# Altium PCB PCB_DMEM_Mezzanine.PcbDoc (part 1 of 4)
Units mil, origin at the board's own origin, x right, y up, seen from the top; angles counter-clockwise.
Board outline 2250 x 3200 mil, 6 copper layers (Top Layer - Signal, AGND-L1, Int. Signal, Power-GND, AGND-D.Sig., Bottom Layer - Signal), stack 32.112 mil thick; 443 components, 241 nets, 1099 pads, 545 vias.
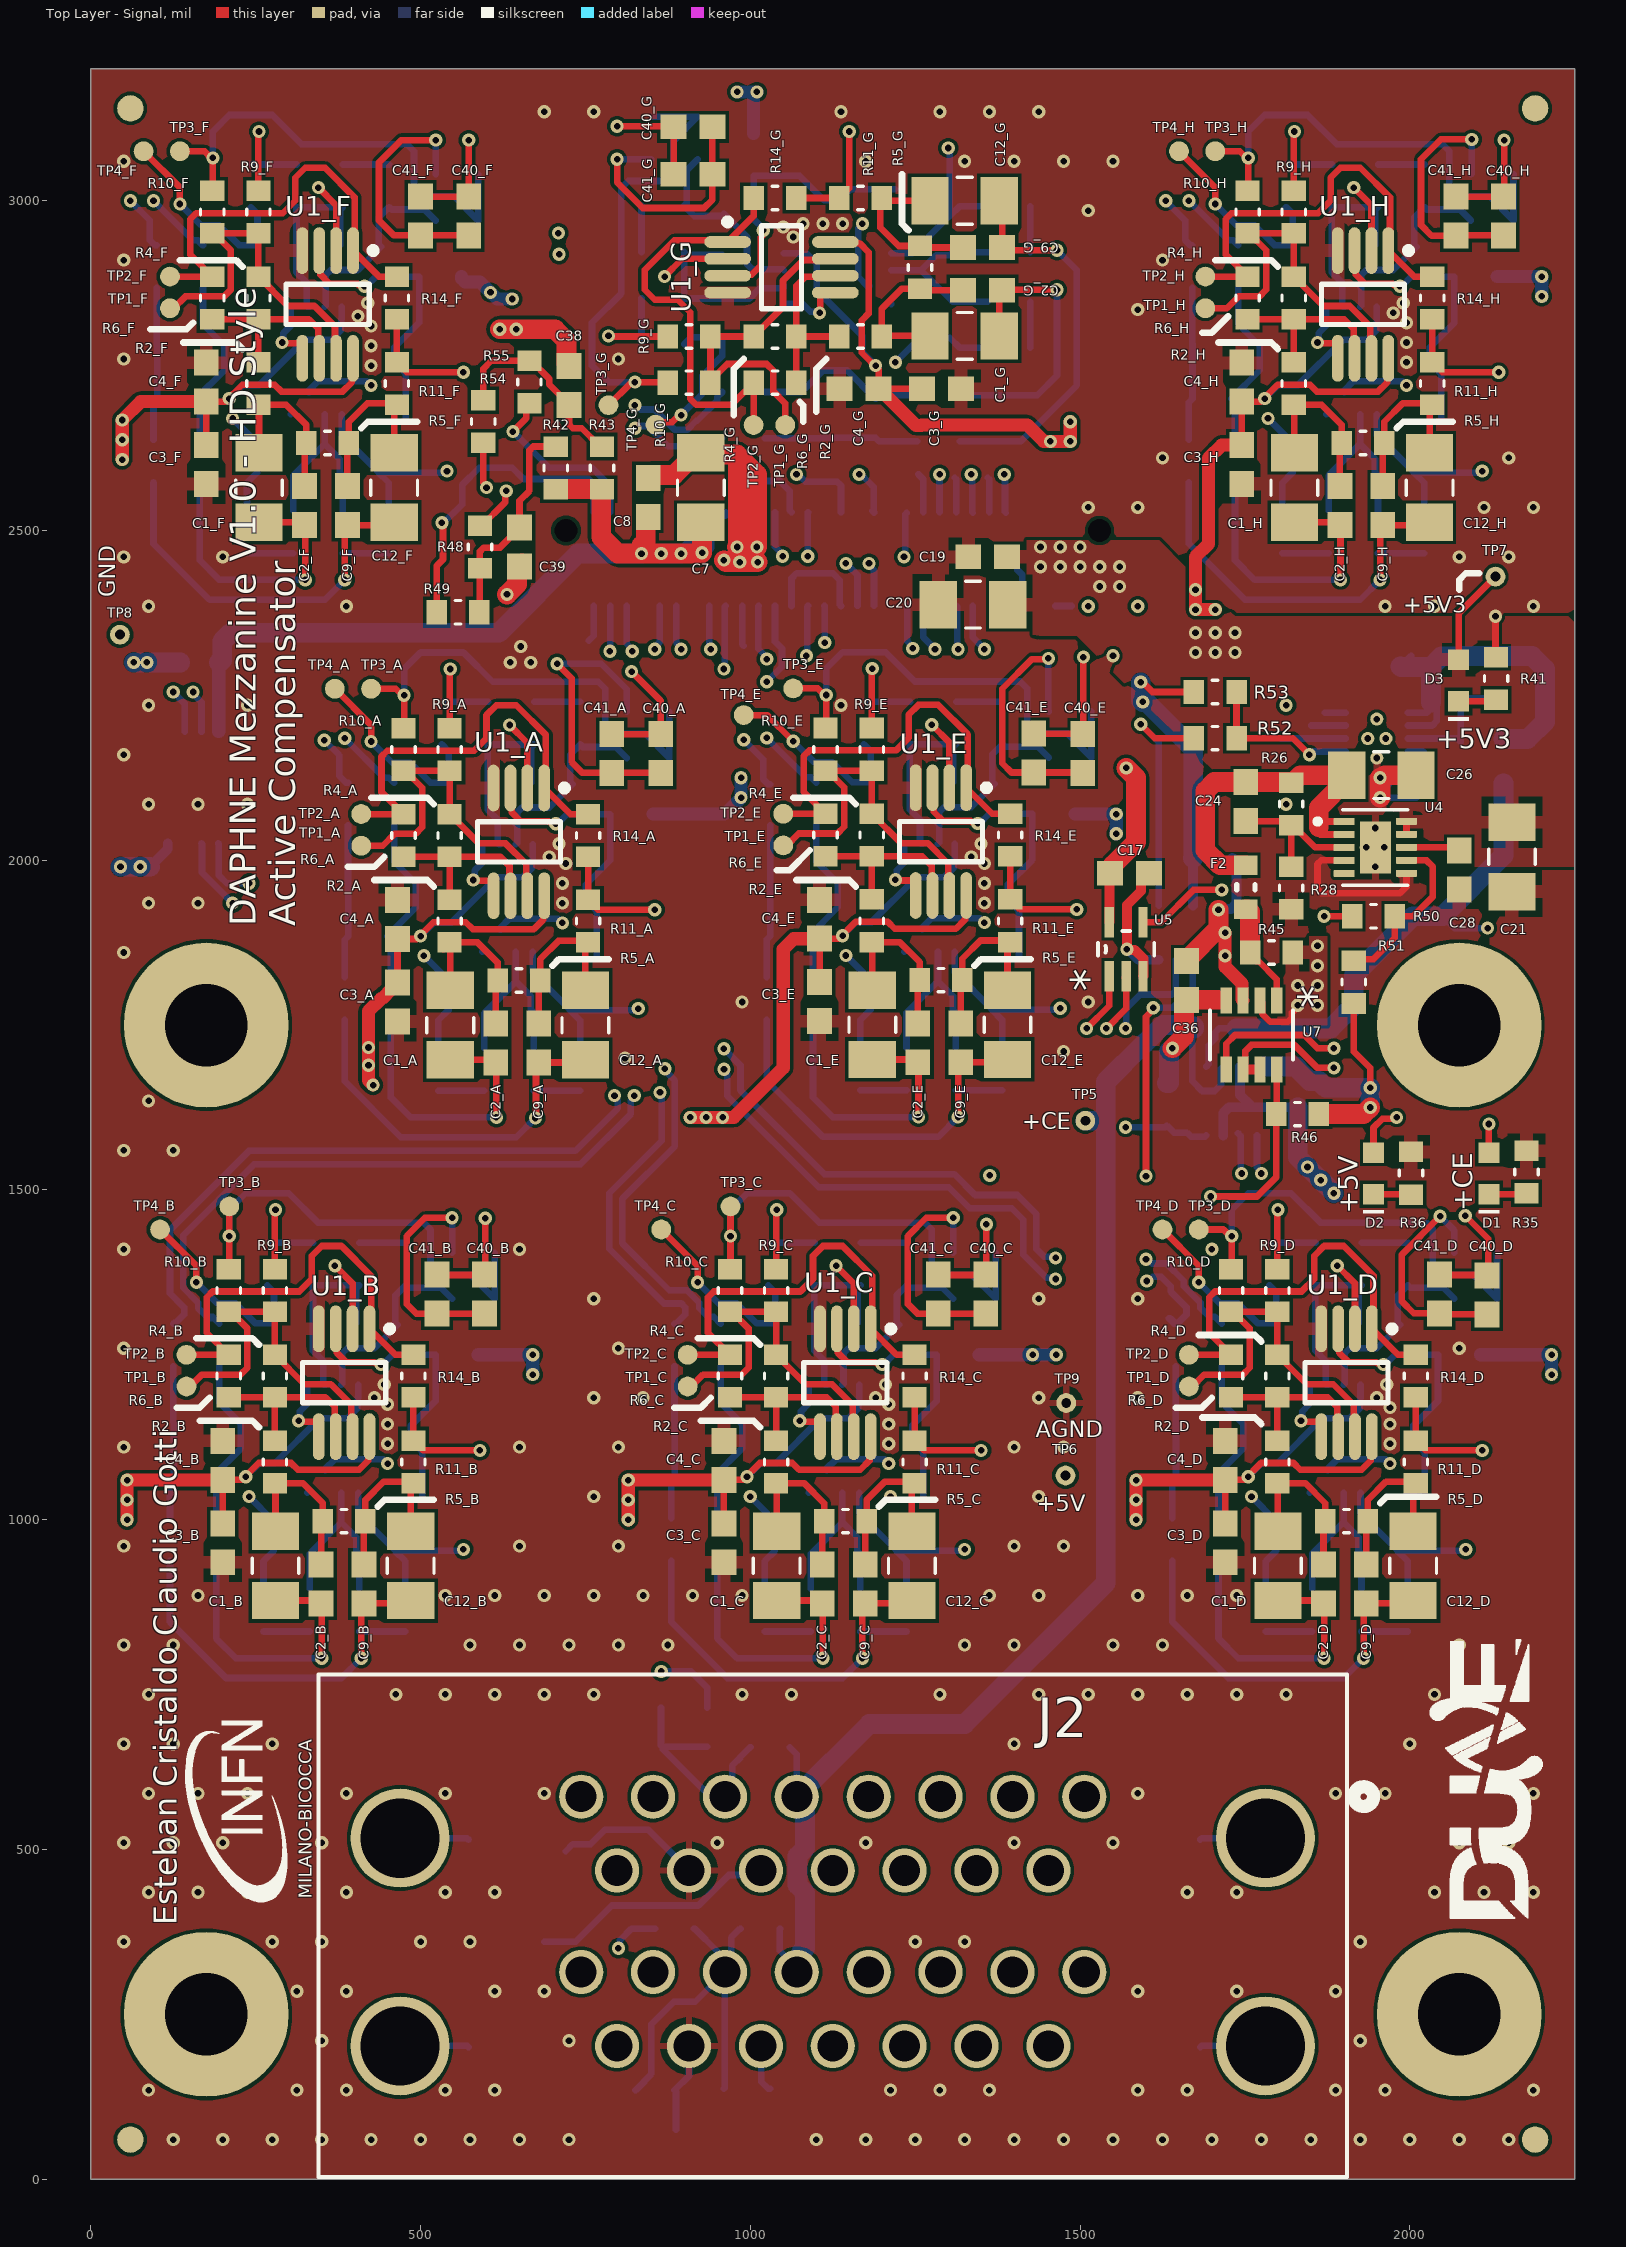
[diagram p0: Top Layer - Signal view]
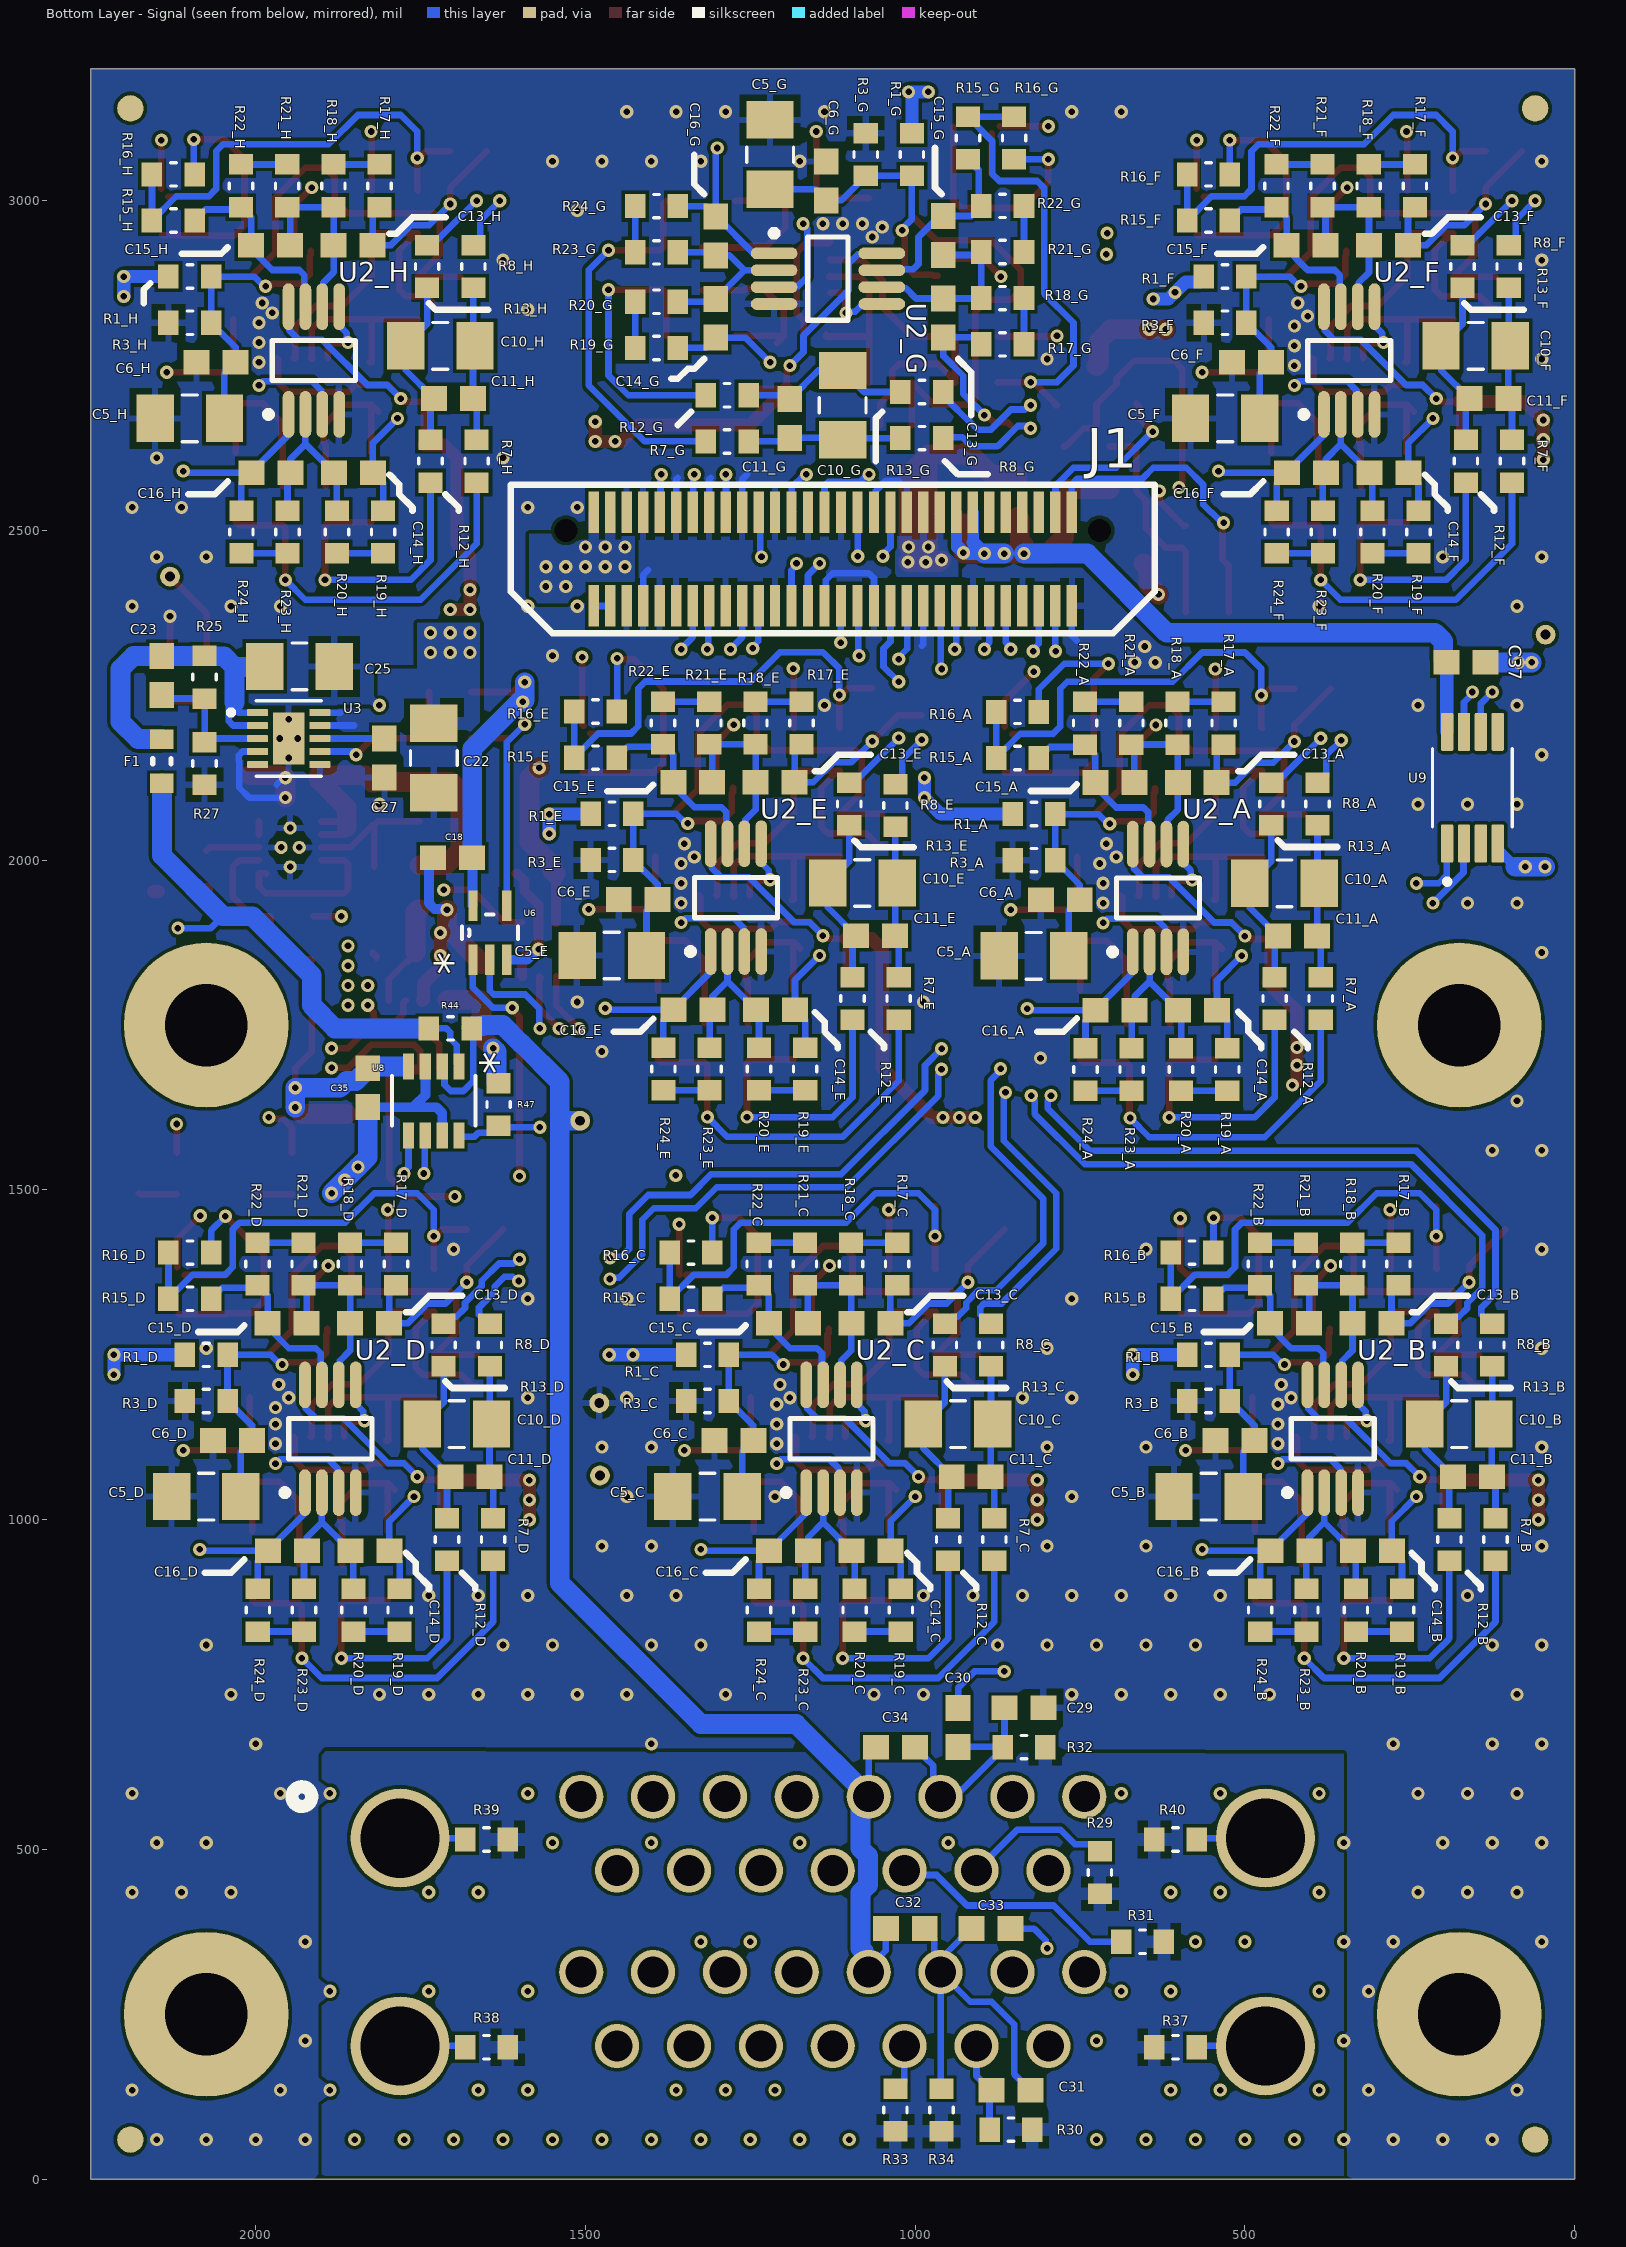
[diagram p1: Bottom Layer - Signal view, seen from below]
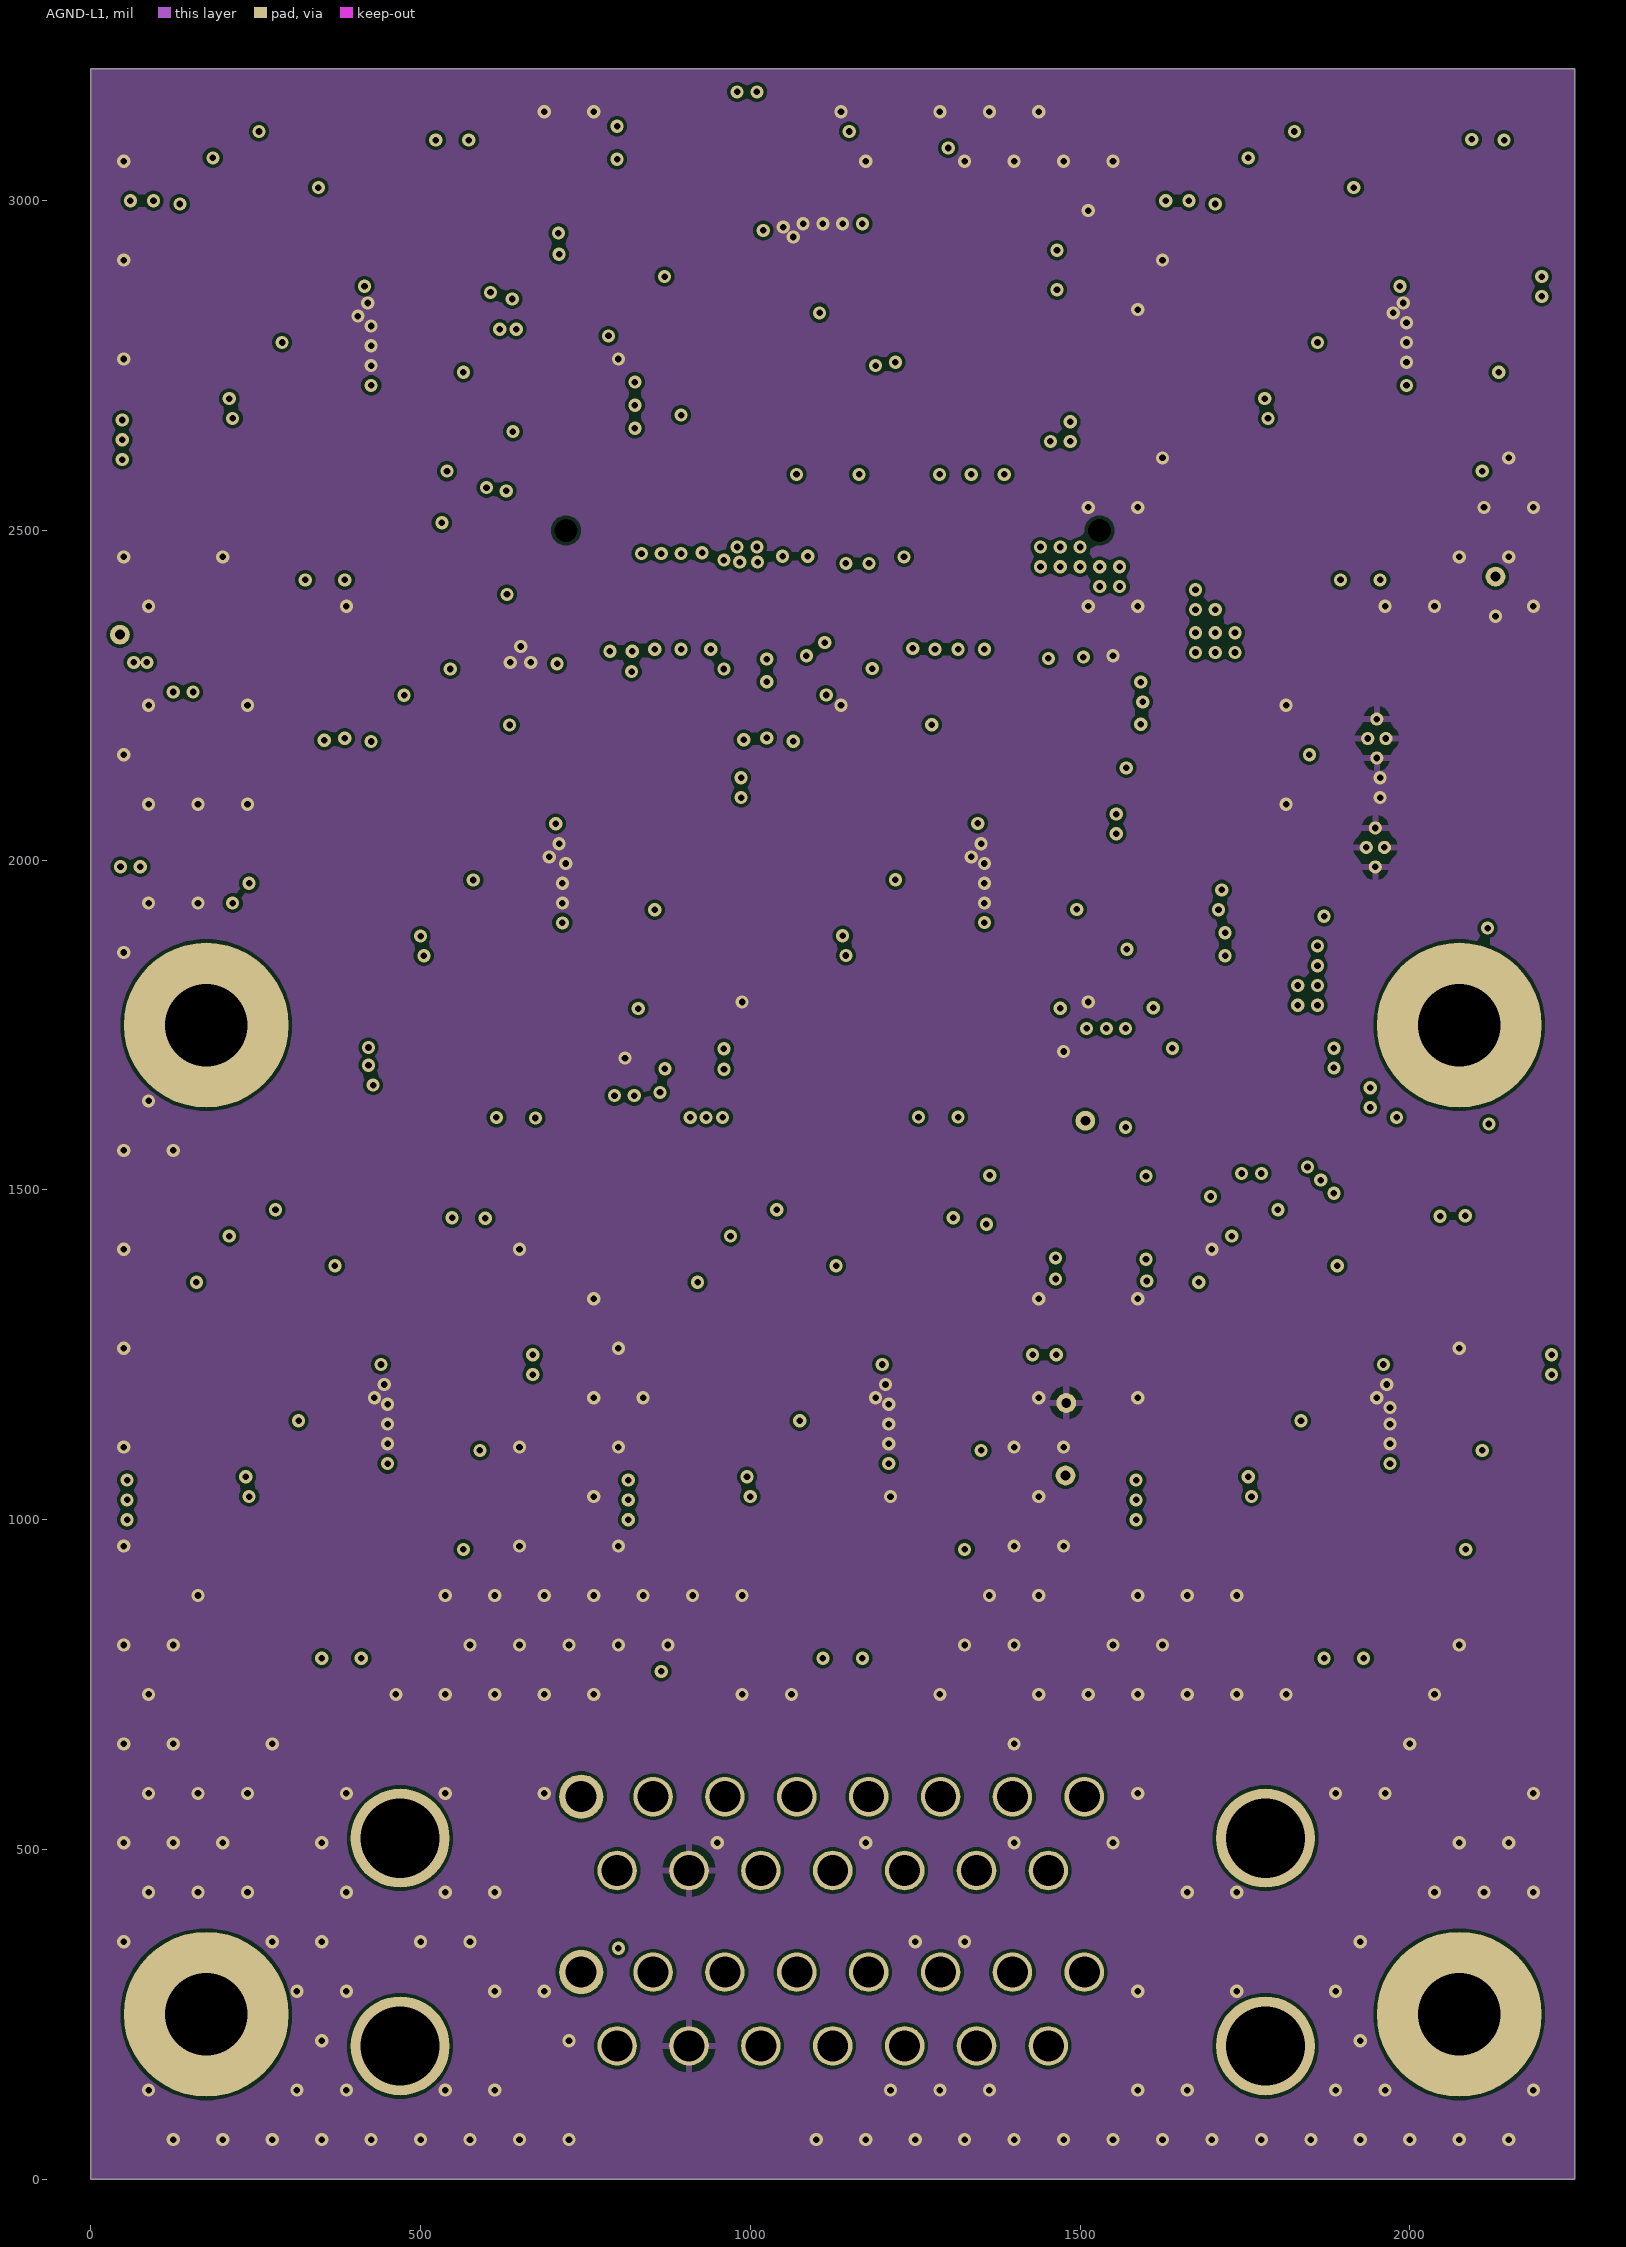
[diagram p2: AGND-L1]
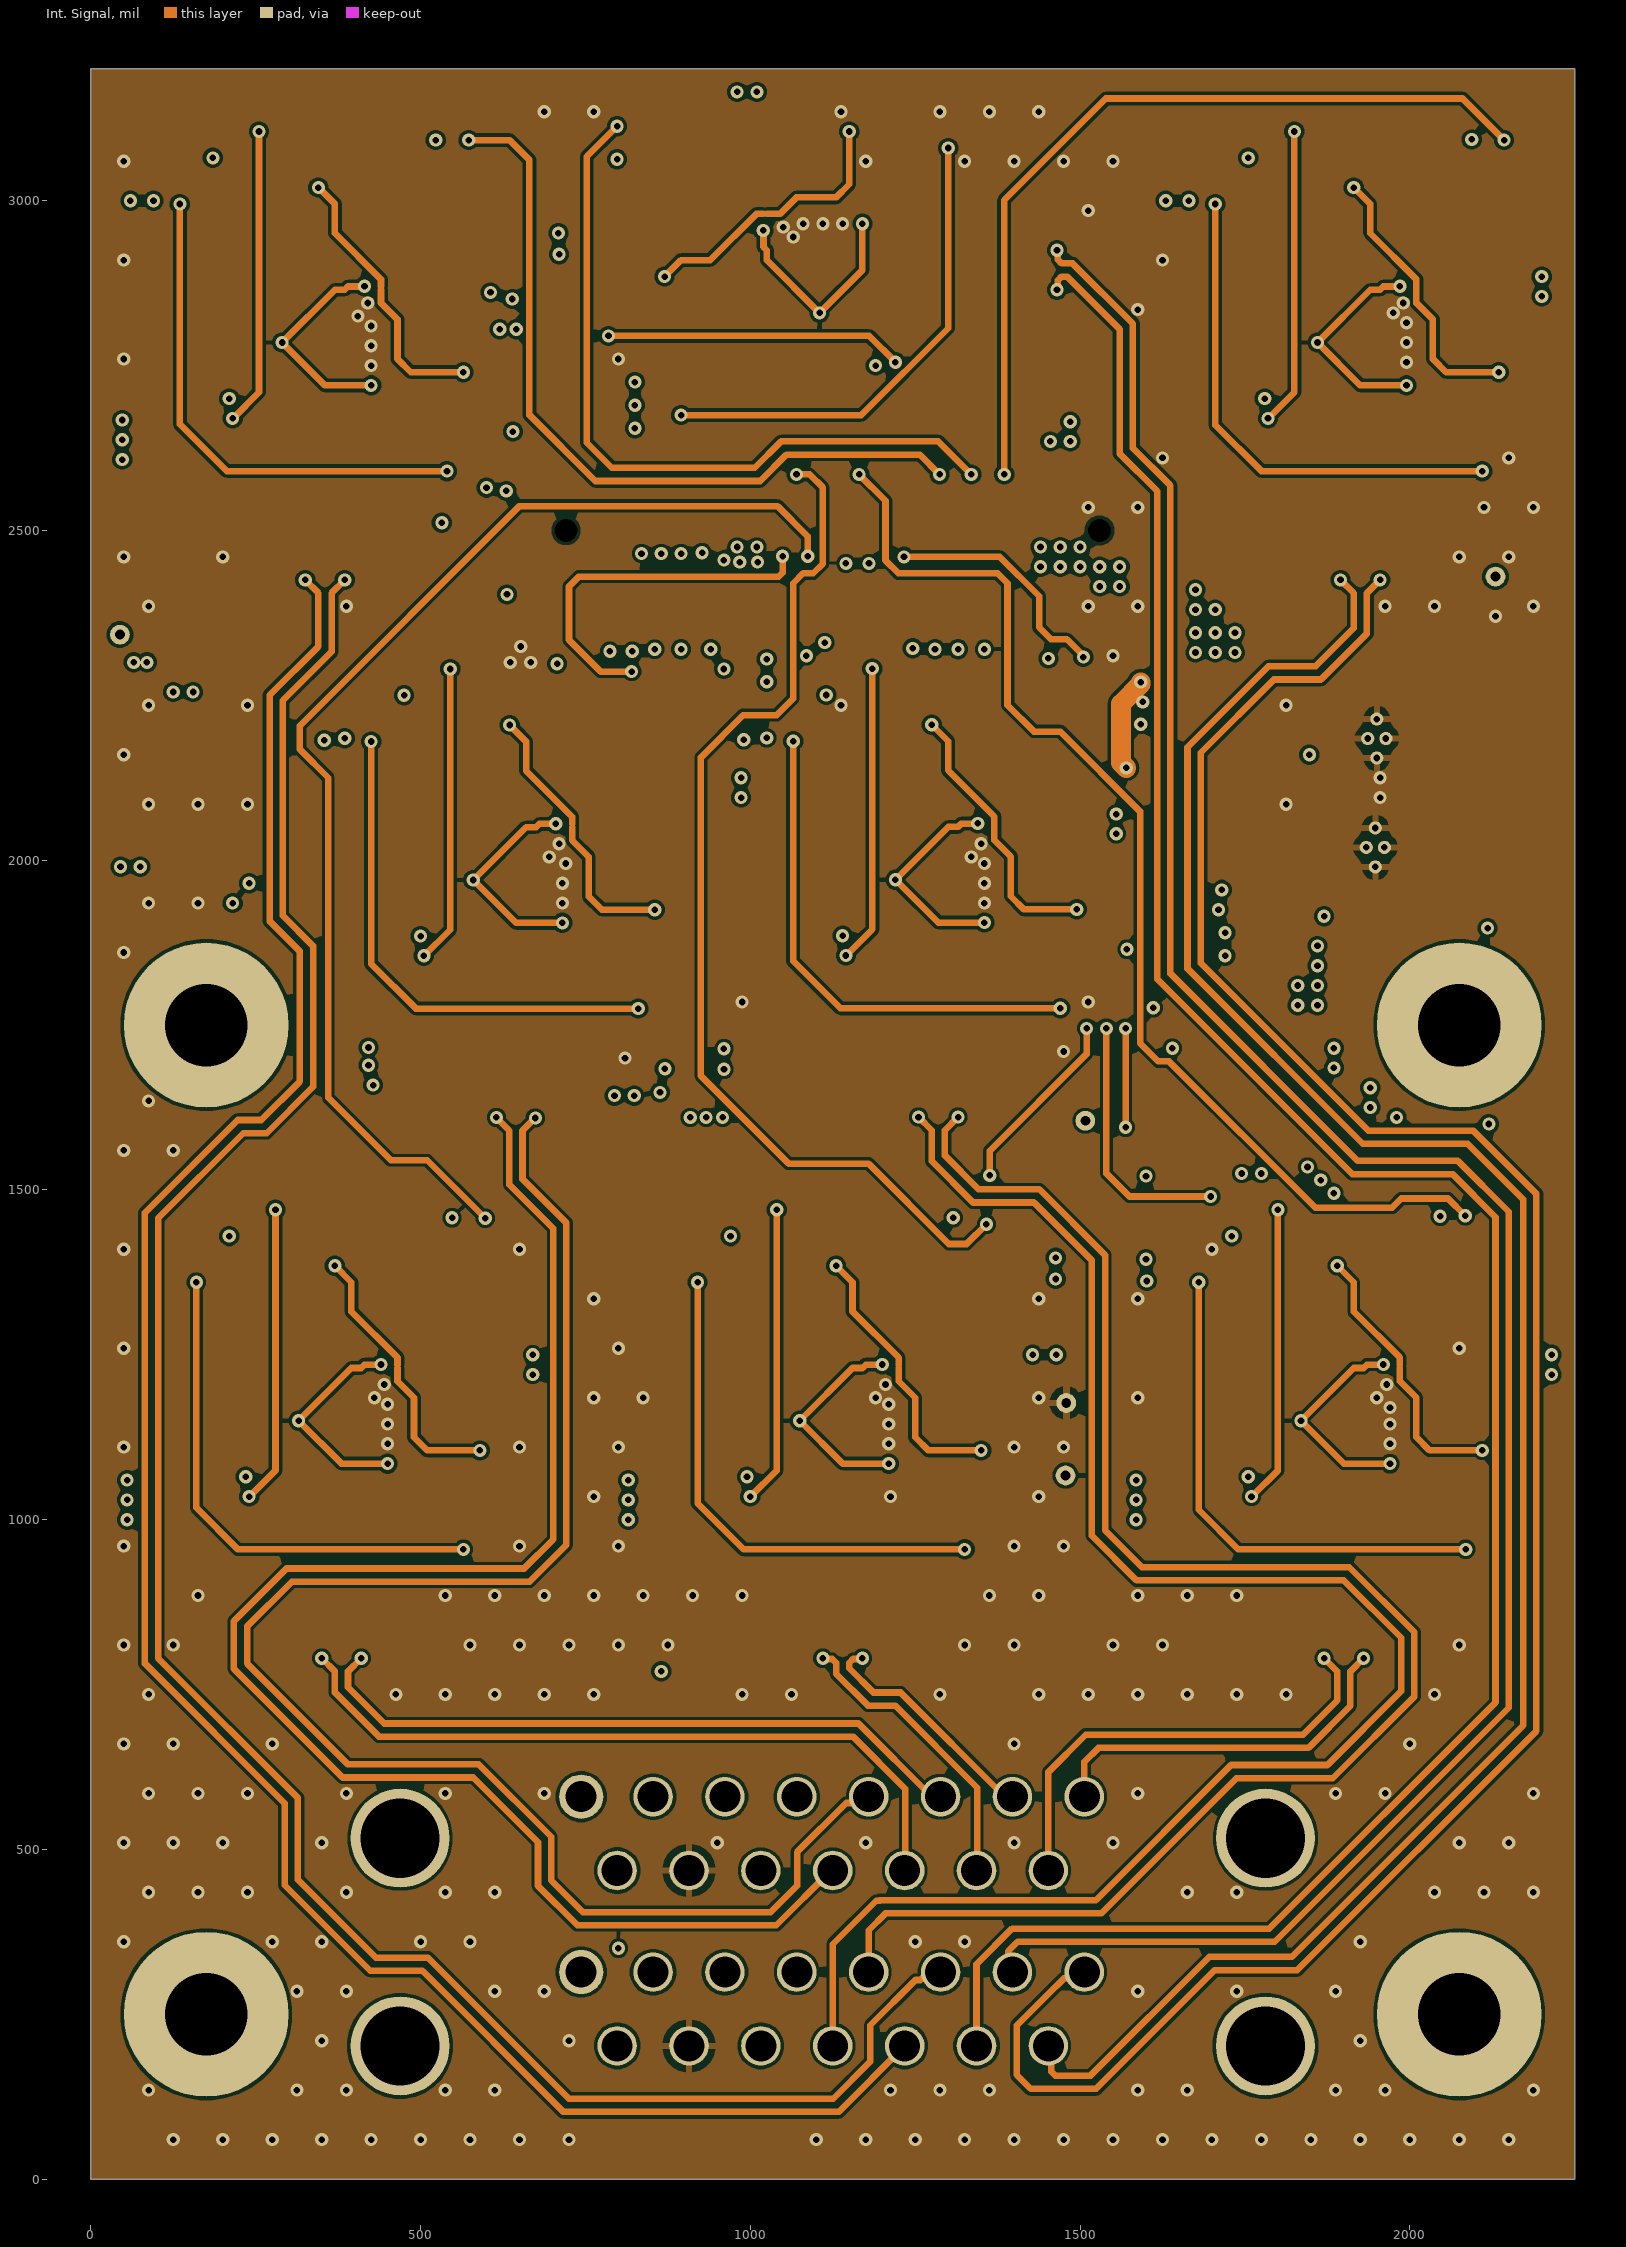
[diagram p3: Int. Signal]
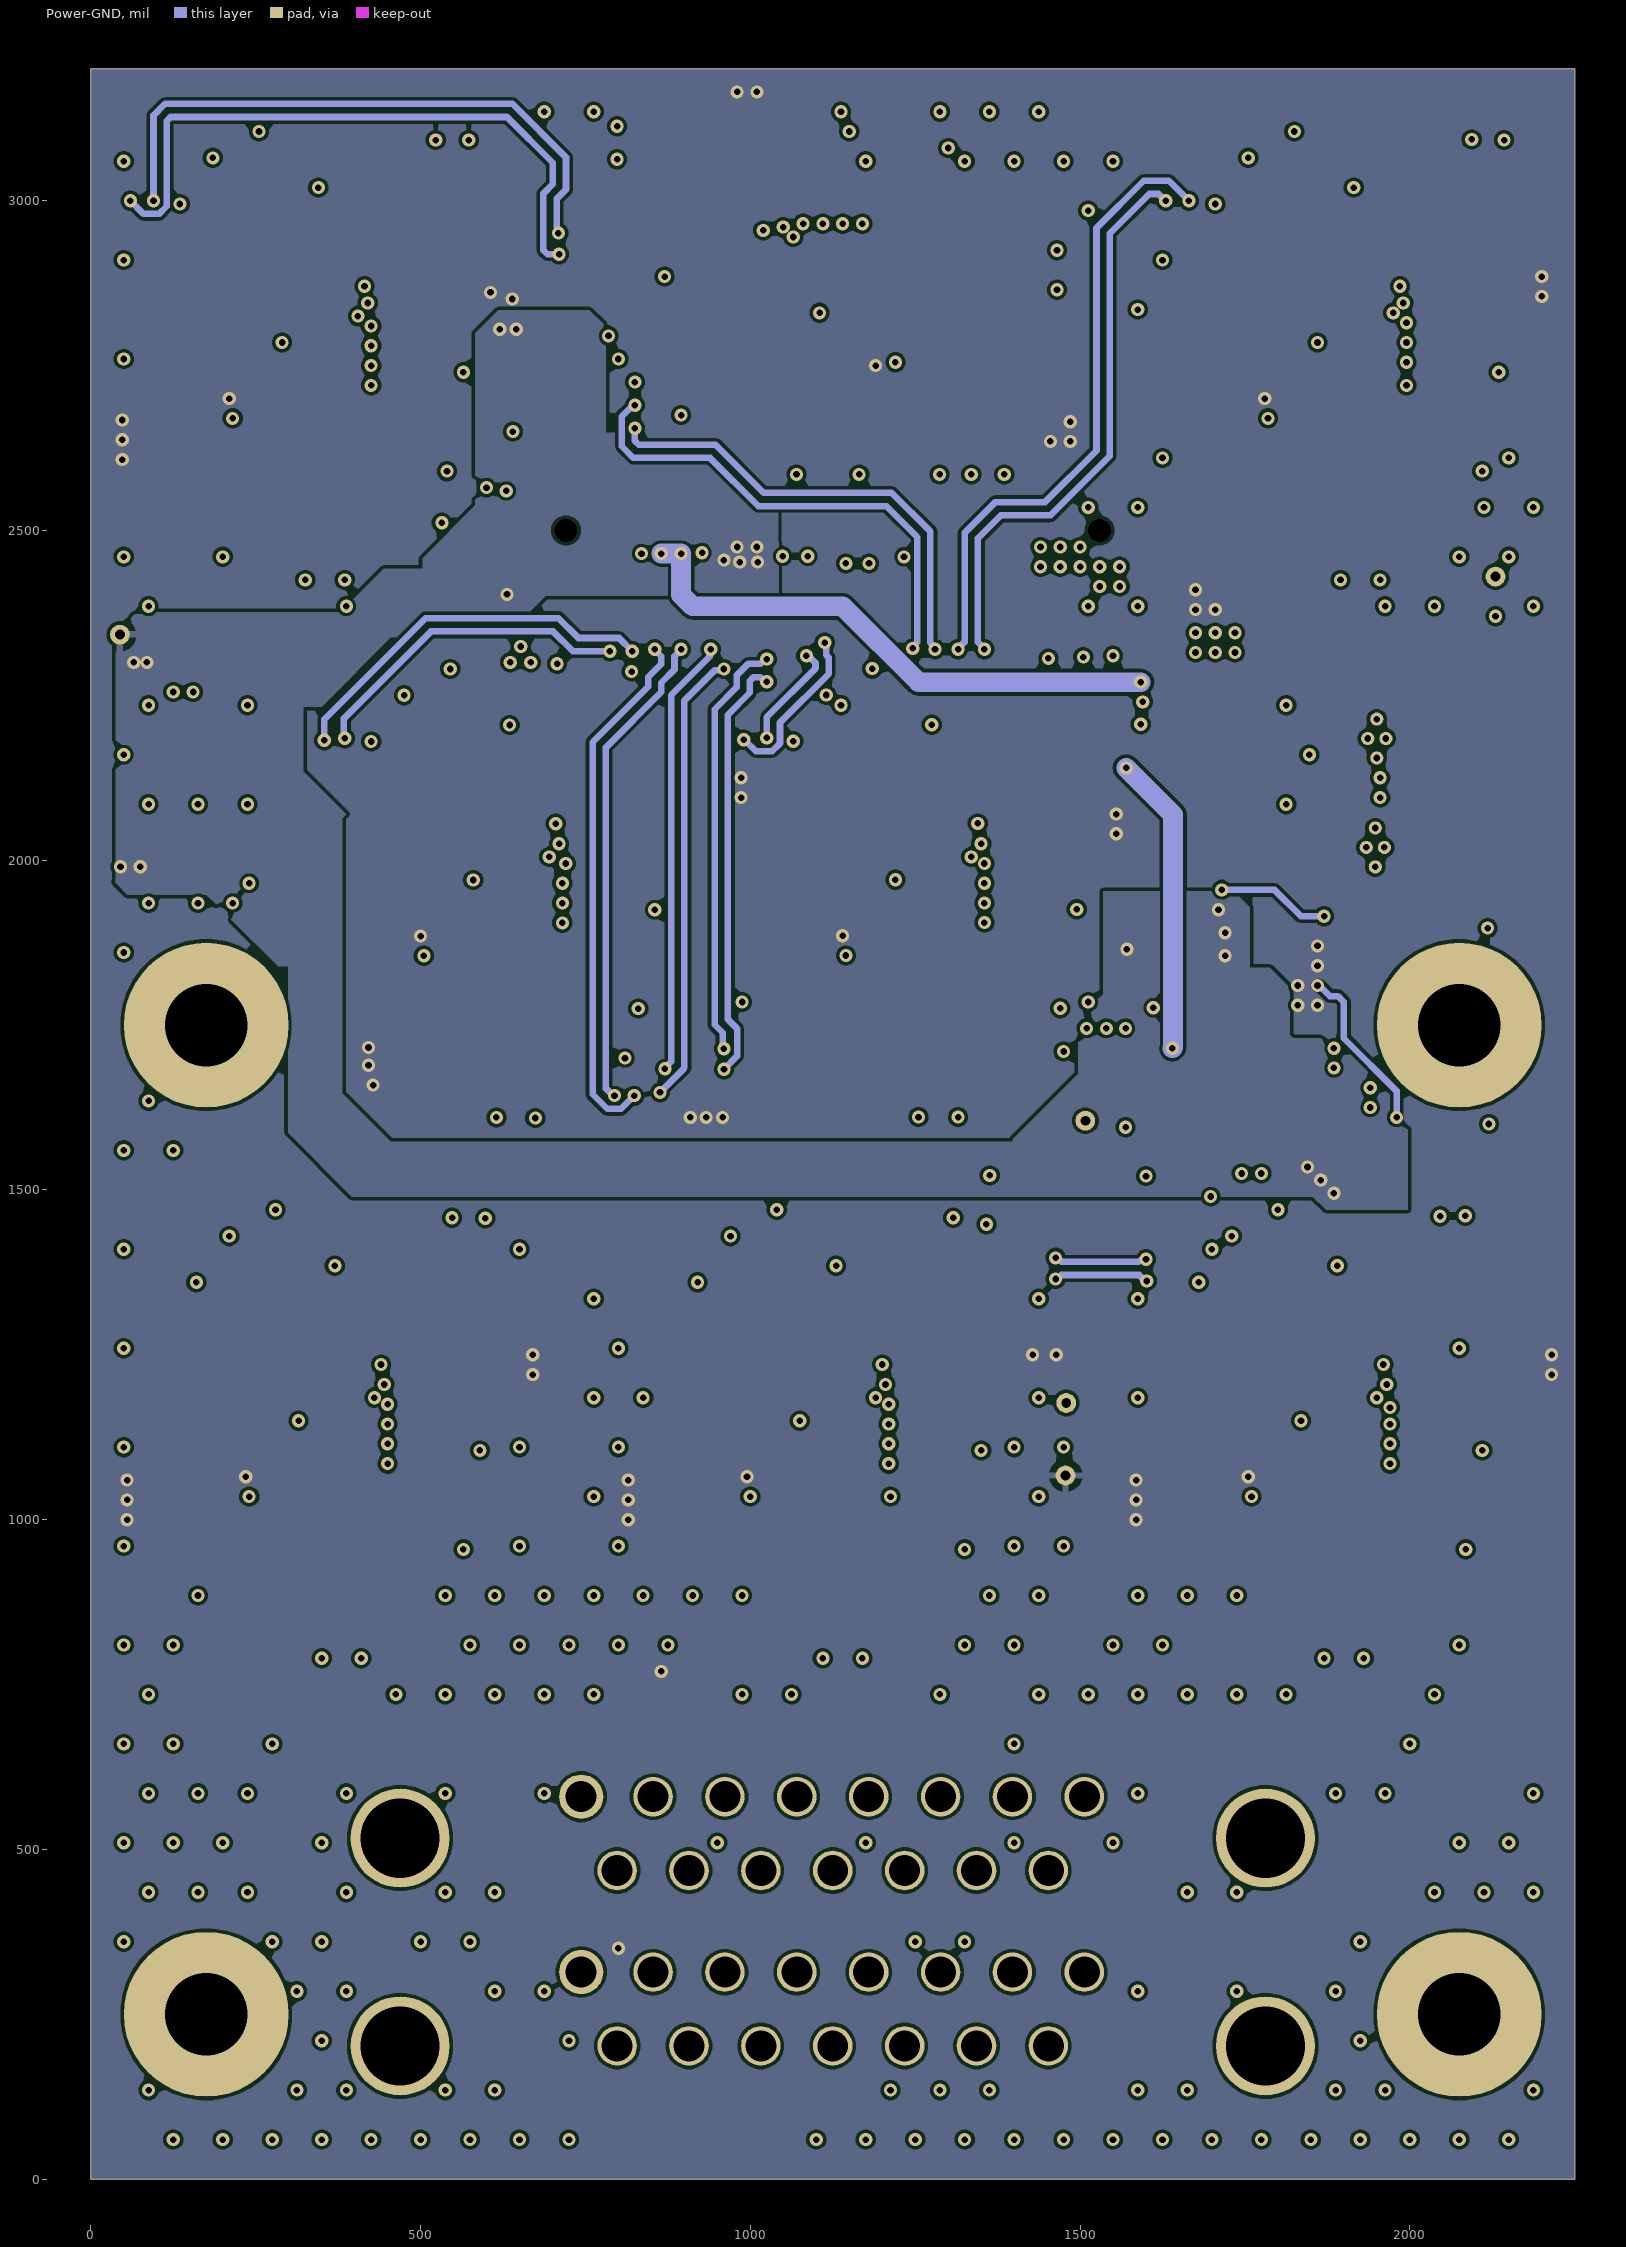
[diagram p4: Power-GND]
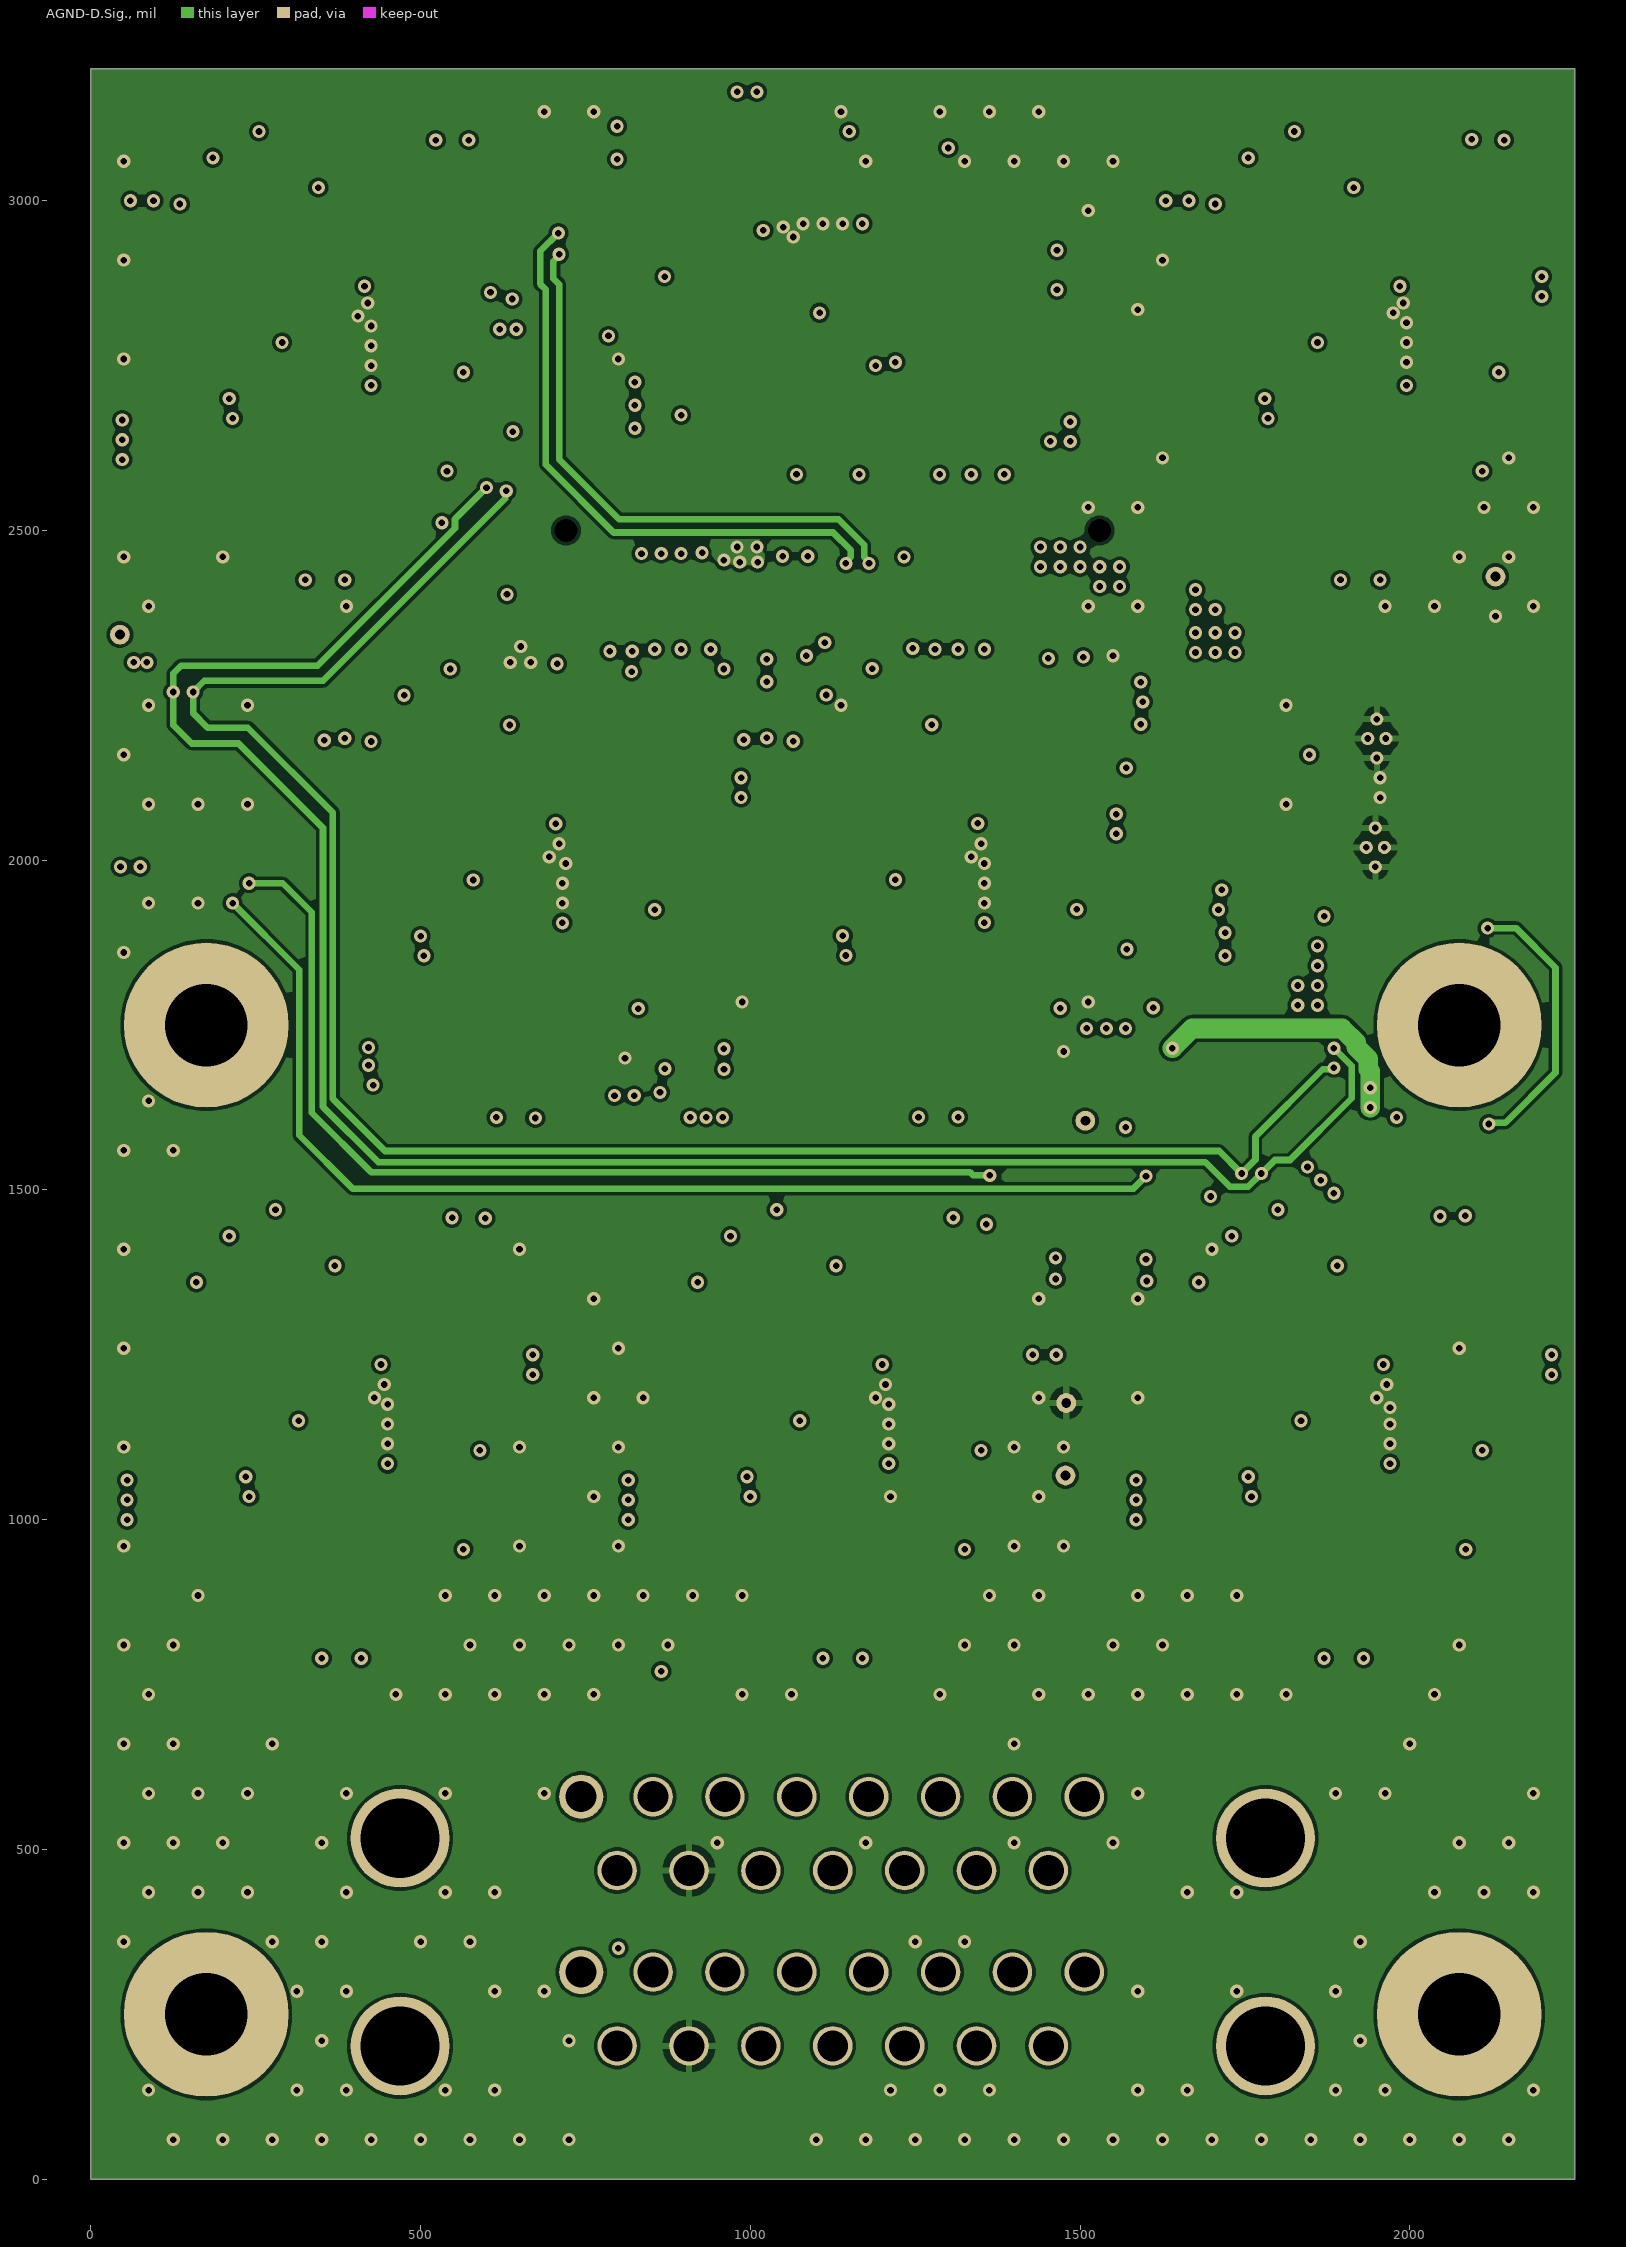
[diagram p5: AGND-D.Sig.]

## Layer stack, top to bottom
Top Solder: solder mask 0.4, Solder Resist, Dk 3.5
Top Layer - Signal: signal copper 1.4
Dielectric 2: prepreg 2.8, PP-006, Dk 4.1
AGND-L1: signal copper 1.378
Dielectric 4: prepreg 2.8, PP-006, Dk 4.1
Int. Signal: signal copper 1.378
Dielectric 1: dielectric 12.6, FR-4, Dk 4.8
Power-GND: signal copper 1.378
Dielectric 5: prepreg 2.8, PP-006, Dk 4.1
AGND-D.Sig.: signal copper 1.378
Dielectric 3: prepreg 2.8, PP-006, Dk 4.1
Bottom Layer - Signal: signal copper 1.4
Bottom Solder: solder mask 0.4, Solder Resist, Dk 3.5

## Board outline
0,0 0,3200 2250,3200 2250,0

## Design rules (kind name [scope] priority, off if disabled: settings)
Clearance [All] p1: gap=5 ignorepadtopadclearanceinfootprint=TRUE
DiffPairsRouting [All] p1: maxlimit=10 minlimit=10 mostfreqgap=10 toplayer_minwidth=10 toplayer_maxwidth=10 toplayer_prefwidth=10 midlayer1_minwidth=10 midlayer1_maxwidth=10 midlayer1_prefwidth=10 midlayer2_minwidth=10 midlayer2_maxwidth=10 midlayer2_prefwidth=10 midlayer3_minwidth=10 midlayer3_maxwidth=10 midlayer3_prefwidth=10 midlayer4_minwidth=10 midlayer4_maxwidth=10 midlayer4_prefwidth=10 bottomlayer_minwidth=10 bottomlayer_maxwidth=10 bottomlayer_prefwidth=10 maxuncoupledlength=500
Height [All] p1: minheight=0 maxheight=5000 prefheight=500
HoleSize [IsVia] p1: absolutevalues=TRUE maxlimit=100 minlimit=1 maxpercent=80.000 minpercent=20.000
MinimumAnnularRing [All] p1: minimumring=5
MinimumSolderMaskSliver [All] p1: minsoldermaskwidth=1
PlaneConnect [All] p1: pad.planeconnectstyle=Relief pad.reliefexpansion=20 pad.reliefentries=4 pad.reliefconductorwidth=10 pad.reliefairgap=10 via.planeconnectstyle=Direct via.reliefexpansion=20 via.reliefentries=4 via.reliefconductorwidth=10 via.reliefairgap=10
PolygonConnect PolygonConnect_7 [All vs IsNamedPolygon('GND_L06_P047')] p1: thpad.connectstyle=Relief thpad.reliefconductorwidth=10 thpad.reliefentries=4 thpad.polygonreliefangle="90 Angle" thpad.airgapwidth=10 smdpad.connectstyle=Relief smdpad.reliefconductorwidth=10 smdpad.reliefentries=4 smdpad.polygonreliefangle="90 Angle" smdpad.airgapwidth=10 via.connectstyle=Direct via.reliefconductorwidth=10 via.reliefentries=4 via.polygonreliefangle="90 Angle" via.airgapwidth=10
PolygonConnect PolygonConnect_6 [All vs IsNamedPolygon('AGND_L06_P052')] p2: thpad.connectstyle=Relief thpad.reliefconductorwidth=10 thpad.reliefentries=4 thpad.polygonreliefangle="90 Angle" thpad.airgapwidth=10 smdpad.connectstyle=Relief smdpad.reliefconductorwidth=10 smdpad.reliefentries=4 smdpad.polygonreliefangle="90 Angle" smdpad.airgapwidth=10 via.connectstyle=Direct via.reliefconductorwidth=10 via.reliefentries=4 via.polygonreliefangle="90 Angle" via.airgapwidth=10
PolygonConnect PolygonConnect_5 [All vs IsNamedPolygon('GND_L06_P047')] p3: thpad.connectstyle=Relief thpad.reliefconductorwidth=10 thpad.reliefentries=4 thpad.polygonreliefangle="90 Angle" thpad.airgapwidth=10 smdpad.connectstyle=Relief smdpad.reliefconductorwidth=15 smdpad.reliefentries=4 smdpad.polygonreliefangle="90 Angle" smdpad.airgapwidth=10 via.connectstyle=Relief via.reliefconductorwidth=10 via.reliefentries=4 via.polygonreliefangle="90 Angle" via.airgapwidth=10
PolygonConnect PolygonConnect_4 [All vs IsNamedPolygon('AGND_L06_P052')] p4: thpad.connectstyle=Relief thpad.reliefconductorwidth=10 thpad.reliefentries=4 thpad.polygonreliefangle="90 Angle" thpad.airgapwidth=10 smdpad.connectstyle=Relief smdpad.reliefconductorwidth=15 smdpad.reliefentries=4 smdpad.polygonreliefangle="90 Angle" smdpad.airgapwidth=10 via.connectstyle=Relief via.reliefconductorwidth=10 via.reliefentries=4 via.polygonreliefangle="90 Angle" via.airgapwidth=10
PolygonConnect PolygonConnect_3 [All vs IsNamedPolygon('+5V3A_L06_P040')] p5: thpad.connectstyle=Relief thpad.reliefconductorwidth=10 thpad.reliefentries=4 thpad.polygonreliefangle="90 Angle" thpad.airgapwidth=10 smdpad.connectstyle=Relief smdpad.reliefconductorwidth=15 smdpad.reliefentries=4 smdpad.polygonreliefangle="90 Angle" smdpad.airgapwidth=10 via.connectstyle=Relief via.reliefconductorwidth=10 via.reliefentries=4 via.polygonreliefangle="90 Angle" via.airgapwidth=10
PolygonConnect PolygonConnect_2 [All vs IsNamedPolygon('NONET_L01_P054')] p6: connectstyle=Relief reliefconductorwidth=10 reliefentries=4 polygonreliefangle="90 Angle" airgapwidth=10
PolygonConnect PolygonConnect_1 [All vs IsNamedPolygon('+5V3A_L01_P027') Or IsNamedPolygon('AGND_L01_P030') Or IsNamedPolygon('INP_5V_L01_P026') Or IsNamedPolygon('AGND_L02_P032') Or IsNamedPolygon('AGND_L03_P033') Or IsNamedPolygon('INN_5V_L04_P034') Or IsNamedPolygon('INP_5V_L05_P028') Or IsNamedPolygon('+5V3A_L06_P023') Or IsNamedPolygon('+5V3A_L06_P025') Or IsNamedPolygon('AGND_L06_P035') Or IsNamedPolygon('GND_L06_P031') Or IsNamedPolygon('SHLD_GND_L06_P029')] p7: thpad.connectstyle=Relief thpad.reliefconductorwidth=10 thpad.reliefentries=4 thpad.polygonreliefangle="90 Angle" thpad.airgapwidth=10 smdpad.connectstyle=Relief smdpad.reliefconductorwidth=20 smdpad.reliefentries=4 smdpad.polygonreliefangle="90 Angle" smdpad.airgapwidth=10 via.connectstyle=Direct via.reliefconductorwidth=10 via.reliefentries=4 via.polygonreliefangle="90 Angle" via.airgapwidth=10
PolygonConnect [All] p8: thpad.connectstyle=Relief thpad.reliefconductorwidth=10 thpad.reliefentries=4 thpad.polygonreliefangle="90 Angle" thpad.airgapwidth=10 smdpad.connectstyle=Relief smdpad.reliefconductorwidth=20 smdpad.reliefentries=4 smdpad.polygonreliefangle="90 Angle" smdpad.airgapwidth=10 via.connectstyle=Direct via.reliefconductorwidth=10 via.reliefentries=4 via.polygonreliefangle="90 Angle" via.airgapwidth=10
RoomDefinition C [InComponentClass('C')] p1: confinementstyle=ConfineIn formatcopy=TRUE lockcomponents=FALSE outline 820,735 1430,735 1430,1505 820,1505
RoomDefinition D [InComponentClass('D')] p2: confinementstyle=ConfineIn formatcopy=TRUE lockcomponents=FALSE outline 1580,735 2190,735 2190,1505 1580,1505
RoomDefinition E [InComponentClass('E')] p3: confinementstyle=ConfineIn formatcopy=TRUE lockcomponents=FALSE outline 965,1555.47 1575,1555.47 1575,2325.47 965,2325.47
RoomDefinition Regulator_5V [InComponentClass('Room Definition2')] p4: confinementstyle=ConfineIn formatcopy=TRUE lockcomponents=FALSE outline 1711.5,1883.9 2192.91,1883.9 2192.91,2183.9 1711.5,2183.9
RoomDefinition Regulator_CE [InComponentClass('Room Definition1')] p5: confinementstyle=ConfineIn formatcopy=TRUE lockcomponents=FALSE outline 1708.5,2053.9 2189.92,2053.9 2189.92,2353.9 1708.5,2353.9
RoomDefinition B [InComponentClass('B')] p6: confinementstyle=ConfineIn formatcopy=TRUE lockcomponents=FALSE outline 60,735 670,735 670,1505 60,1505
RoomDefinition A [InComponentClass('A')] p7: confinementstyle=ConfineIn formatcopy=TRUE lockcomponents=FALSE outline 325,1555 935,1555 935,2325 325,2325
RoomDefinition F [InComponentClass('F')] p8: confinementstyle=ConfineIn formatcopy=TRUE lockcomponents=FALSE outline 35,2370 645,2370 645,3140 35,3140
RoomDefinition H [InComponentClass('H')] p9: confinementstyle=ConfineIn formatcopy=TRUE lockcomponents=FALSE outline 1605,2370 2215,2370 2215,3140 1605,3140
RoomDefinition G [InComponentClass('G')] p10: confinementstyle=ConfineIn formatcopy=TRUE lockcomponents=FALSE outline 1520,2595 1520,3185 750,3185 750,2595
RoutingVias [All] p1: holewidth=10 width=20 viastyle="Through Hole" minholewidth=10 minwidth=20 maxholewidth=28 maxwidth=50
SilkToSilkClearance [All] p1: silktosilkclearance=1
SilkToSolderMaskClearance [IsPad] p1: minsilkscreentomaskgap=1 clearancetoexposedcopper=TRUE
SolderMaskExpansion [All] p1: expansion=4 istentingtop=FALSE
SupplyNets "Schematic Supply Nets_8" [InNet('INN_CE')] p1: voltage=0.000
SupplyNets "Schematic Supply Nets_7" [InNet('INN_5V')] p2: voltage=0.000
SupplyNets "Schematic Supply Nets" [InNet('GND')] p3: voltage=0.000
SupplyNets "Schematic Supply Nets_3" [InNet('3V3VDPS')] p4: voltage=0.000
SupplyNets "Schematic Supply Nets_6" [InNet('-5V3A')] p5: voltage=0.000
SupplyNets "Schematic Supply Nets_5" [InNet('+5V3A')] p6: voltage=0.000
SupplyNets "Schematic Supply Nets_2" [InNet('AGND')] p7: voltage=0.000
Width [All] p1: maxlimit=50 minlimit=10 preferedwidth=10
23 further rules are at their usual default settings.

## Classes and differential pairs
channel class diff2singleEnded: A B C D E F G H
component class top_level: C7 C8 C17 C18 C19 C20 C21 C22 C23 C24 C25 C26 C27 C28 C29 C30 C31 C32 C33 C34 C35 C36 C37 C38 C39 D1 D2 D3 F1 F2 J1 J2 R25 R26 R27 R28 R29 R30 R31 R32 R33 R34 R35 R36 R37 R38 R39 R40 R41 R42 R43 R44 R45 R46 R47 R48 R49 R50 R51 R52 R53 R54 R55 TP5 TP6 TP7 TP8 TP9 U3 U4 U5 U6 U7 U8 U9
component class H: C1_H C2_H C3_H C4_H C5_H C6_H C9_H C10_H C11_H C12_H C13_H C14_H C15_H C16_H C40_H C41_H R1_H R2_H R3_H R4_H R5_H R6_H R7_H R8_H R9_H R10_H R11_H R12_H R13_H R14_H R15_H R16_H R17_H R18_H R19_H R20_H R21_H R22_H R23_H R24_H TP1_H TP2_H TP3_H TP4_H U1_H U2_H
component class G: C1_G C2_G C3_G C4_G C5_G C6_G C9_G C10_G C11_G C12_G C13_G C14_G C15_G C16_G C40_G C41_G R1_G R2_G R3_G R4_G R5_G R6_G R7_G R8_G R9_G R10_G R11_G R12_G R13_G R14_G R15_G R16_G R17_G R18_G R19_G R20_G R21_G R22_G R23_G R24_G TP1_G TP2_G TP3_G TP4_G U1_G U2_G
component class F: C1_F C2_F C3_F C4_F C5_F C6_F C9_F C10_F C11_F C12_F C13_F C14_F C15_F C16_F C40_F C41_F R1_F R2_F R3_F R4_F R5_F R6_F R7_F R8_F R9_F R10_F R11_F R12_F R13_F R14_F R15_F R16_F R17_F R18_F R19_F R20_F R21_F R22_F R23_F R24_F TP1_F TP2_F TP3_F TP4_F U1_F U2_F
component class E: C1_E C2_E C3_E C4_E C5_E C6_E C9_E C10_E C11_E C12_E C13_E C14_E C15_E C16_E C40_E C41_E R1_E R2_E R3_E R4_E R5_E R6_E R7_E R8_E R9_E R10_E R11_E R12_E R13_E R14_E R15_E R16_E R17_E R18_E R19_E R20_E R21_E R22_E R23_E R24_E TP1_E TP2_E TP3_E TP4_E U1_E U2_E
component class D: C1_D C2_D C3_D C4_D C5_D C6_D C9_D C10_D C11_D C12_D C13_D C14_D C15_D C16_D C40_D C41_D R1_D R2_D R3_D R4_D R5_D R6_D R7_D R8_D R9_D R10_D R11_D R12_D R13_D R14_D R15_D R16_D R17_D R18_D R19_D R20_D R21_D R22_D R23_D R24_D TP1_D TP2_D TP3_D TP4_D U1_D U2_D
component class C: C1_C C2_C C3_C C4_C C5_C C6_C C9_C C10_C C11_C C12_C C13_C C14_C C15_C C16_C C40_C C41_C R1_C R2_C R3_C R4_C R5_C R6_C R7_C R8_C R9_C R10_C R11_C R12_C R13_C R14_C R15_C R16_C R17_C R18_C R19_C R20_C R21_C R22_C R23_C R24_C TP1_C TP2_C TP3_C TP4_C U1_C U2_C
component class B: C1_B C2_B C3_B C4_B C5_B C6_B C9_B C10_B C11_B C12_B C13_B C14_B C15_B C16_B C40_B C41_B R1_B R2_B R3_B R4_B R5_B R6_B R7_B R8_B R9_B R10_B R11_B R12_B R13_B R14_B R15_B R16_B R17_B R18_B R19_B R20_B R21_B R22_B R23_B R24_B TP1_B TP2_B TP3_B TP4_B U1_B U2_B
component class A: C1_A C2_A C3_A C4_A C5_A C6_A C9_A C10_A C11_A C12_A C13_A C14_A C15_A C16_A C40_A C41_A R1_A R2_A R3_A R4_A R5_A R6_A R7_A R8_A R9_A R10_A R11_A R12_A R13_A R14_A R15_A R16_A R17_A R18_A R19_A R20_A R21_A R22_A R23_A R24_A TP1_A TP2_A TP3_A TP4_A U1_A U2_A
differential pair W7: +W7_P -W7_N
differential pair W6: +W6_P -W6_N
differential pair W5: +W5_P -W5_N
differential pair W4: +W4_P -W4_N
differential pair W3: +W3_P -W3_N
differential pair W2: +W2_P -W2_N
differential pair W1: +W1_P -W1_N
differential pair W0: +W0_P -W0_N
differential pair C7: +C7_P -C7_N
differential pair C6: +C6_P -C6_N
differential pair C5: +C5_P -C5_N
differential pair C4: +C4_P -C4_N
differential pair C3: +C3_P -C3_N
differential pair C2: +C2_P -C2_N
differential pair C1: +C1_P -C1_N
differential pair C0: +C0_P -C0_N

## Components (designator, comment, footprint, x,y, rotation, side; value= is the part's Value field where it differs from the comment)
C1_A "C3216X6S2A106K160AC" CAPC3216X190N 545,1750 r90 top value=10u (schematic designator C1)
C1_B "C3216X6S2A106K160AC" CAPC3216X190N 280,930 r90 top value=10u (schematic designator C1)
C1_C "C3216X6S2A106K160AC" CAPC3216X190N 1040,930 r90 top value=10u (schematic designator C1)
C1_D "C3216X6S2A106K160AC" CAPC3216X190N 1800,930 r90 top value=10u (schematic designator C1)
C1_E "C3216X6S2A106K160AC" CAPC3216X190N 1185,1750.47 r90 top value=10u (schematic designator C1)
C1_F "C3216X6S2A106K160AC" CAPC3216X190N 255,2565 r90 top value=10u (schematic designator C1)
C1_G "C3216X6S2A106K160AC" CAPC3216X190N 1325,2795 r180 top value=10u (schematic designator C1)
C1_H "C3216X6S2A106K160AC" CAPC3216X190N 1825,2565 r90 top value=10u (schematic designator C1)
C2_A "CC0603KRX7R0BB104" CAPC1608X09N 614.09,1722.72 r90 top value=100n (schematic designator C2)
C2_B "CC0603KRX7R0BB104" CAPC1608X09N 349.09,902.72 r90 top value=100n (schematic designator C2)
C2_C "CC0603KRX7R0BB104" CAPC1608X09N 1109.09,902.72 r90 top value=100n (schematic designator C2)
C2_D "CC0603KRX7R0BB104" CAPC1608X09N 1869.09,902.72 r90 top value=100n (schematic designator C2)
C2_E "CC0603KRX7R0BB104" CAPC1608X09N 1254.09,1723.19 r90 top value=100n (schematic designator C2)
C2_F "CC0603KRX7R0BB104" CAPC1608X09N 324.09,2537.72 r90 top value=100n (schematic designator C2)
C2_G "CC0603KRX7R0BB104" CAPC1608X09N 1352.28,2864.09 r180 top value=100n (schematic designator C2)
C2_H "CC0603KRX7R0BB104" CAPC1608X09N 1894.09,2537.72 r90 top value=100n (schematic designator C2)
C3_A "CC0603KRX7R0BB104" CAPC1608X09N 465,1785 r90 top value=100n (schematic designator C3)
C3_B "CC0603KRX7R0BB104" CAPC1608X09N 200,965 r90 top value=100n (schematic designator C3)
C3_C "CC0603KRX7R0BB104" CAPC1608X09N 960,965 r90 top value=100n (schematic designator C3)
C3_D "CC0603KRX7R0BB104" CAPC1608X09N 1720,965 r90 top value=100n (schematic designator C3)
C3_E "CC0603KRX7R0BB104" CAPC1608X09N 1105,1785.47 r90 top value=100n (schematic designator C3)
C3_F "CC0603KRX7R0BB104" CAPC1608X09N 175,2600 r90 top value=100n (schematic designator C3)
C3_G "CC0603KRX7R0BB104" CAPC1608X09N 1290,2715 r180 top value=100n (schematic designator C3)
C3_H "CC0603KRX7R0BB104" CAPC1608X09N 1745,2600 r90 top value=100n (schematic designator C3)
C4_A "CC0603KRX7R0BB104" CAPC1608X09N 465,1910 r270 top value=100n (schematic designator C4)
C4_B "CC0603KRX7R0BB104" CAPC1608X09N 200,1090 r270 top value=100n (schematic designator C4)
C4_C "CC0603KRX7R0BB104" CAPC1608X09N 960,1090 r270 top value=100n (schematic designator C4)
C4_D "CC0603KRX7R0BB104" CAPC1608X09N 1720,1090 r270 top value=100n (schematic designator C4)
C4_E "CC0603KRX7R0BB104" CAPC1608X09N 1105,1910.47 r270 top value=100n (schematic designator C4)
C4_F "CC0603KRX7R0BB104" CAPC1608X09N 175,2725 r270 top value=100n (schematic designator C4)
C4_G "CC0603KRX7R0BB104" CAPC1608X09N 1165,2715 r0 top value=100n (schematic designator C4)
C4_H "CC0603KRX7R0BB104" CAPC1608X09N 1745,2725 r270 top value=100n (schematic designator C4)
C5_A "CL31A106KPHNNNE" CAPC3216X190N 820,1855 r180 bottom value=10u (schematic designator C5)
C5_B "CL31A106KPHNNNE" CAPC3216X190N 555,1035 r180 bottom value=10u (schematic designator C5)
C5_C "CL31A106KPHNNNE" CAPC3216X190N 1315,1035 r180 bottom value=10u (schematic designator C5)
C5_D "CL31A106KPHNNNE" CAPC3216X190N 2075,1035 r180 bottom value=10u (schematic designator C5)
C5_E "CL31A106KPHNNNE" CAPC3216X190N 1460,1855.47 r180 bottom value=10u (schematic designator C5)
C5_F "CL31A106KPHNNNE" CAPC3216X190N 530,2670 r180 bottom value=10u (schematic designator C5)
C5_G "CL31A106KPHNNNE" CAPC3216X190N 1220,3070 r270 bottom value=10u (schematic designator C5)
C5_H "CL31A106KPHNNNE" CAPC3216X190N 2100,2670 r180 bottom value=10u (schematic designator C5)
C6_A "CC0603KRX7R0BB104" CAPC1608X09N 780,1940 r180 bottom value=100n (schematic designator C6)
C6_B "CC0603KRX7R0BB104" CAPC1608X09N 515,1120 r180 bottom value=100n (schematic designator C6)
C6_C "CC0603KRX7R0BB104" CAPC1608X09N 1275,1120 r180 bottom value=100n (schematic designator C6)
C6_D "CC0603KRX7R0BB104" CAPC1608X09N 2035,1120 r180 bottom value=100n (schematic designator C6)
C6_E "CC0603KRX7R0BB104" CAPC1608X09N 1420,1940.47 r180 bottom value=100n (schematic designator C6)
C6_F "CC0603KRX7R0BB104" CAPC1608X09N 490,2755 r180 bottom value=100n (schematic designator C6)
C6_G "CC0603KRX7R0BB104" CAPC1608X09N 1135,3030 r270 bottom value=100n (schematic designator C6)
C6_H "CC0603KRX7R0BB104" CAPC1608X09N 2060,2755 r180 bottom value=100n (schematic designator C6)
C7 "C3216X6S2A106K160AC" CAPC3216X190N 925,2565 r90 top value=10u
C8 "CC0603KRX7R0BB104" CAPC1608X09N 845,2550 r270 top value=100n
C9_A "CC0603KRX7R0BB104" CAPC1608X09N 679.09,1722.72 r90 top value=100n (schematic designator C9)
C9_B "CC0603KRX7R0BB104" CAPC1608X09N 414.09,902.72 r90 top value=100n (schematic designator C9)
C9_C "CC0603KRX7R0BB104" CAPC1608X09N 1174.09,902.72 r90 top value=100n (schematic designator C9)
C9_D "CC0603KRX7R0BB104" CAPC1608X09N 1934.09,902.72 r90 top value=100n (schematic designator C9)
C9_E "CC0603KRX7R0BB104" CAPC1608X09N 1319.09,1723.19 r90 top value=100n (schematic designator C9)
C9_F "CC0603KRX7R0BB104" CAPC1608X09N 389.09,2537.72 r90 top value=100n (schematic designator C9)
C9_G "CC0603KRX7R0BB104" CAPC1608X09N 1352.28,2929.09 r180 top value=100n (schematic designator C9)
C9_H "CC0603KRX7R0BB104" CAPC1608X09N 1959.09,2537.72 r90 top value=100n (schematic designator C9)
C10_A "C3216X6S2A106K160AC" CAPC3216X190N 440,1965 r180 bottom value=10u (schematic designator C10)
C10_B "C3216X6S2A106K160AC" CAPC3216X190N 175,1145 r180 bottom value=10u (schematic designator C10)
C10_C "C3216X6S2A106K160AC" CAPC3216X190N 935,1145 r180 bottom value=10u (schematic designator C10)
C10_D "C3216X6S2A106K160AC" CAPC3216X190N 1695,1145 r180 bottom value=10u (schematic designator C10)
C10_E "C3216X6S2A106K160AC" CAPC3216X190N 1080,1965.47 r180 bottom value=10u (schematic designator C10)
C10_F "C3216X6S2A106K160AC" CAPC3216X190N 150,2780 r180 bottom value=10u (schematic designator C10)
C10_G "C3216X6S2A106K160AC" CAPC3216X190N 1110,2690 r270 bottom value=10u (schematic designator C10)
C10_H "C3216X6S2A106K160AC" CAPC3216X190N 1720,2780 r180 bottom value=10u (schematic designator C10)
C11_A "CC0603KRX7R0BB104" CAPC1608X09N 420,1885 r180 bottom value=100n (schematic designator C11)
C11_B "CC0603KRX7R0BB104" CAPC1608X09N 155,1065 r180 bottom value=100n (schematic designator C11)
C11_C "CC0603KRX7R0BB104" CAPC1608X09N 915,1065 r180 bottom value=100n (schematic designator C11)
C11_D "CC0603KRX7R0BB104" CAPC1608X09N 1675,1065 r180 bottom value=100n (schematic designator C11)
C11_E "CC0603KRX7R0BB104" CAPC1608X09N 1060,1885.47 r180 bottom value=100n (schematic designator C11)
C11_F "CC0603KRX7R0BB104" CAPC1608X09N 130,2700 r180 bottom value=100n (schematic designator C11)
C11_G "CC0603KRX7R0BB104" CAPC1608X09N 1190,2670 r270 bottom value=100n (schematic designator C11)
C11_H "CC0603KRX7R0BB104" CAPC1608X09N 1700,2700 r180 bottom value=100n (schematic designator C11)
C12_A "C3216X6S2A106K160AC" CAPC3216X190N 750,1750 r90 top value=10u (schematic designator C12)
C12_B "C3216X6S2A106K160AC" CAPC3216X190N 485,930 r90 top value=10u (schematic designator C12)
C12_C "C3216X6S2A106K160AC" CAPC3216X190N 1245,930 r90 top value=10u (schematic designator C12)
C12_D "C3216X6S2A106K160AC" CAPC3216X190N 2005,930 r90 top value=10u (schematic designator C12)
C12_E "C3216X6S2A106K160AC" CAPC3216X190N 1390,1750.47 r90 top value=10u (schematic designator C12)
C12_F "C3216X6S2A106K160AC" CAPC3216X190N 460,2565 r90 top value=10u (schematic designator C12)
C12_G "C3216X6S2A106K160AC" CAPC3216X190N 1325,3000 r180 top value=10u (schematic designator C12)
C12_H "C3216X6S2A106K160AC" CAPC3216X190N 2030,2565 r90 top value=10u (schematic designator C12)
C13_A "GCM1885C2A680FA16D" CAPC1608X09N 572.28,2117.72 r0 bottom value=68p (schematic designator C13)
C13_B "GCM1885C2A680FA16D" CAPC1608X09N 307.28,1297.72 r0 bottom value=68p (schematic designator C13)
C13_C "GCM1885C2A680FA16D" CAPC1608X09N 1067.28,1297.72 r0 bottom value=68p (schematic designator C13)
C13_D "GCM1885C2A680FA16D" CAPC1608X09N 1827.28,1297.72 r0 bottom value=68p (schematic designator C13)
C13_E "GCM1885C2A680FA16D" CAPC1608X09N 1212.28,2118.19 r0 bottom value=68p (schematic designator C13)
C13_F "GCM1885C2A680FA16D" CAPC1608X09N 282.28,2932.72 r0 bottom value=68p (schematic designator C13)
C13_G "GCM1885C2A680FA16D" CAPC1608X09N 957.28,2822.28 r90 bottom value=68p (schematic designator C13)
C13_H "GCM1885C2A680FA16D" CAPC1608X09N 1852.28,2932.72 r0 bottom value=68p (schematic designator C13)
C14_A "GCM1885C2A680FA16D" CAPC1608X09N 571.81,1772.72 r0 bottom value=68p (schematic designator C14)
C14_B "GCM1885C2A680FA16D" CAPC1608X09N 306.81,952.72 r0 bottom value=68p (schematic designator C14)
C14_C "GCM1885C2A680FA16D" CAPC1608X09N 1066.81,952.72 r0 bottom value=68p (schematic designator C14)
C14_D "GCM1885C2A680FA16D" CAPC1608X09N 1826.81,952.72 r0 bottom value=68p (schematic designator C14)
C14_E "GCM1885C2A680FA16D" CAPC1608X09N 1211.81,1773.19 r0 bottom value=68p (schematic designator C14)
C14_F "GCM1885C2A680FA16D" CAPC1608X09N 281.81,2587.72 r0 bottom value=68p (schematic designator C14)
C14_G "GCM1885C2A680FA16D" CAPC1608X09N 1302.28,2821.81 r90 bottom value=68p (schematic designator C14)
C14_H "GCM1885C2A680FA16D" CAPC1608X09N 1851.81,2587.72 r0 bottom value=68p (schematic designator C14)
C15_A "GCM1885C2A680FA16D" CAPC1608X09N 697.28,2117.72 r0 bottom value=68p (schematic designator C15)
C15_B "GCM1885C2A680FA16D" CAPC1608X09N 432.28,1297.72 r0 bottom value=68p (schematic designator C15)
C15_C "GCM1885C2A680FA16D" CAPC1608X09N 1192.28,1297.72 r0 bottom value=68p (schematic designator C15)
C15_D "GCM1885C2A680FA16D" CAPC1608X09N 1952.28,1297.72 r0 bottom value=68p (schematic designator C15)
C15_E "GCM1885C2A680FA16D" CAPC1608X09N 1337.28,2118.19 r0 bottom value=68p (schematic designator C15)
C15_F "GCM1885C2A680FA16D" CAPC1608X09N 407.28,2932.72 r0 bottom value=68p (schematic designator C15)
C15_G "GCM1885C2A680FA16D" CAPC1608X09N 957.28,2947.28 r90 bottom value=68p (schematic designator C15)
C15_H "GCM1885C2A680FA16D" CAPC1608X09N 1977.28,2932.72 r0 bottom value=68p (schematic designator C15)
C16_A "GCM1885C2A680FA16D" CAPC1608X09N 696.81,1772.72 r0 bottom value=68p (schematic designator C16)
C16_B "GCM1885C2A680FA16D" CAPC1608X09N 431.81,952.72 r0 bottom value=68p (schematic designator C16)
C16_C "GCM1885C2A680FA16D" CAPC1608X09N 1191.81,952.72 r0 bottom value=68p (schematic designator C16)
C16_D "GCM1885C2A680FA16D" CAPC1608X09N 1951.81,952.72 r0 bottom value=68p (schematic designator C16)
C16_E "GCM1885C2A680FA16D" CAPC1608X09N 1336.81,1773.19 r0 bottom value=68p (schematic designator C16)
C16_F "GCM1885C2A680FA16D" CAPC1608X09N 406.81,2587.72 r0 bottom value=68p (schematic designator C16)
C16_G "GCM1885C2A680FA16D" CAPC1608X09N 1302.28,2946.81 r90 bottom value=68p (schematic designator C16)
C16_H "GCM1885C2A680FA16D" CAPC1608X09N 1976.81,2587.72 r0 bottom value=68p (schematic designator C16)
C17 "CC0603KRX7R0BB104" CAPC1608X09N 1575,1980 r0 top value=100n
C18 "CC0603KRX7R0BB104" CAPC1608X09N 1701.32,2003.68 r0 bottom value=100n
C19 "CC0603KRX7R0BB104" CAPC1608X09N 1360,2460 r0 top value=100n
C20 "C3216X6S2A106K160AC" CAPC3216X190N 1337.59,2387.47 r180 top value=10u
C21 "C3216X6S2A106K160AC" CAPC3216X190N 2155,2005 r270 top value=10u
C22 "C3216X6S2A106K160AC" CAPC3216X190N 1730,2155 r270 bottom value=10u
C23 "0603B103K500CT" CAPC1608X09N 2142.24,2280.16 r90 bottom value=10n
C24 "0603B103K500CT" CAPC1608X09N 1751.5,2088.9 r90 top value=10n
C25 "C3216X6S2A106K160AC" CAPC3216X190N 1933.5,2293.9 r180 bottom value=10u
C26 "C3216X6S2A106K160AC" CAPC3216X190N 1956.74,2128.98 r0 top value=10u
C27 "CC0603KRX7R0BB104" CAPC1608X09N 1805,2155 r90 bottom value=100n
C28 "CC0603KRX7R0BB104" CAPC1608X09N 2075,1985 r90 top value=100n
C29 "CC0603KRX7R0BB104" CAPC1608X09N 835,715 r0 bottom value=100n
C30 "CC0603KRX7R0BB104" CAPC1608X09N 935,685 r270 bottom value=100n
C31 "CC0603KRX7R0BB104" CAPC1608X09N 855,135 r180 bottom value=100n
C32 "CC0603KRX7R0BB104" CAPC1608X09N 1015,380 r180 bottom value=100n
C33 "CC0603KRX7R0BB104" CAPC1608X09N 885,380 r0 bottom value=100n
C34 "CC0603KRX7R0BB104" CAPC1608X09N 1030,655 r180 bottom value=100n
C35 "CC0603KRX7R0BB104" CAPC1608X09N 1830,1655 r90 bottom value=100n
C36 "CC0603KRX7R0BB104" CAPC1608X09N 1661.3,1817.85 r270 top value=100n
C37 "CC0603KRX7R0BB104" CAPC1608X09N 165,2300 r180 bottom value=100n
C38 "GRM1885C1H101JA01D" CAPC1608X09N 725,2720 r90 top value=100p
C39 "GRM1885C1H101JA01D" CAPC1608X09N 650,2475 r270 top value=100p
C40_A "CL10A106KP8NNNC" CAPC1608X09N 864,2162 r90 top value=10u (schematic designator C40)
C40_B "CL10A106KP8NNNC" CAPC1608X09N 597,1342 r90 top value=10u (schematic designator C40)
C40_C "CL10A106KP8NNNC" CAPC1608X09N 1357,1342 r90 top value=10u (schematic designator C40)
C40_D "CL10A106KP8NNNC" CAPC1608X09N 2117,1341 r90 top value=10u (schematic designator C40)
C40_E "CL10A106KP8NNNC" CAPC1608X09N 1504,2162 r90 top value=10u (schematic designator C40)
C40_F "CL10A106KP8NNNC" CAPC1608X09N 573,2977 r90 top value=10u (schematic designator C40)
C40_G "CL10A106KP8NNNC" CAPC1608X09N 913,3112 r180 top value=10u (schematic designator C40)
C40_H "CL10A106KP8NNNC" CAPC1608X09N 2142,2977 r90 top value=10u (schematic designator C40)
C41_A "CC0603KRX7R0BB104" CAPC1608X09N 790,2162 r270 top value=100n (schematic designator C41)
C41_B "CC0603KRX7R0BB104" CAPC1608X09N 525,1342 r270 top value=100n (schematic designator C41)
C41_C "CC0603KRX7R0BB104" CAPC1608X09N 1285,1342 r270 top value=100n (schematic designator C41)
C41_D "CC0603KRX7R0BB104" CAPC1608X09N 2045,1342 r270 top value=100n (schematic designator C41)
C41_E "CC0603KRX7R0BB104" CAPC1608X09N 1430,2162.47 r270 top value=100n (schematic designator C41)
C41_F "CC0603KRX7R0BB104" CAPC1608X09N 500,2977 r270 top value=100n (schematic designator C41)
C41_G "CC0603KRX7R0BB104" CAPC1608X09N 913,3040 r0 top value=100n (schematic designator C41)
C41_H "CC0603KRX7R0BB104" CAPC1608X09N 2070,2977 r270 top value=100n (schematic designator C41)
D1 "150060RS75000" WL-SMCW_0603_150060xx75000 2120,1525 r90 top
D2 "150060RS75000" WL-SMCW_0603_150060xx75000 1945,1525 r90 top
D3 "150060RS75000" WL-SMCW_0603_150060xx75000 2073.99,2272.38 r90 top
F1 "F0603G0R20FNTR" RESC1608X08N 2142.24,2150.16 r270 bottom
F2 "F0603G0R20FNTR" RESC1608X08N 1751.5,1958.9 r270 top
J1 "LSS-130-02-L-DV-A" LSS-130-XX-XX-DV-A 1125,2456.69 r180 bottom
J2 "189-015-513R571" 189-015-513R571 1125,391 r0 top
R1_A "RC0603FR-0710KL" RESC1608X55N 820,2070 r0 bottom value=10K (schematic designator R1)
R1_B "RC0603FR-0710KL" RESC1608X55N 555,1250 r0 bottom value=10K (schematic designator R1)
R1_C "RC0603FR-0710KL" RESC1608X55N 1315,1250 r0 bottom value=10K (schematic designator R1)
R1_D "RC0603FR-0710KL" RESC1608X55N 2075,1250 r0 bottom value=10K (schematic designator R1)
R1_E "RC0603FR-0710KL" RESC1608X55N 1460,2070.47 r0 bottom value=10K (schematic designator R1)
R1_F "RC0603FR-0710KL" RESC1608X55N 530,2885 r0 bottom value=10K (schematic designator R1)
R1_G "RC0603FR-0710KL" RESC1608X55N 1005,3070 r90 bottom value=10K (schematic designator R1)
R1_H "RC0603FR-0710KL" RESC1608X55N 2100,2885 r0 bottom value=10K (schematic designator R1)
R2_A "RT0603BRD07510RL" RESC1608X55N 544.09,1907.72 r90 top value=510R (schematic designator R2)
R2_B "RT0603BRD07510RL" RESC1608X55N 279.09,1087.72 r90 top value=510R (schematic designator R2)
R2_C "RT0603BRD07510RL" RESC1608X55N 1039.09,1087.72 r90 top value=510R (schematic designator R2)
R2_D "RT0603BRD07510RL" RESC1608X55N 1799.09,1087.72 r90 top value=510R (schematic designator R2)
R2_E "RT0603BRD07510RL" RESC1608X55N 1184.09,1908.19 r90 top value=510R (schematic designator R2)
R2_F "RT0603BRD07510RL" RESC1608X55N 254.09,2722.72 r90 top value=510R (schematic designator R2)
R2_G "RT0603BRD07510RL" RESC1608X55N 1167.28,2794.09 r180 top value=510R (schematic designator R2)
R2_H "RT0603BRD07510RL" RESC1608X55N 1824.09,2722.72 r90 top value=510R (schematic designator R2)
R3_A "RC0603FR-0710KL" RESC1608X55N 820,2000 r180 bottom value=10K (schematic designator R3)
R3_B "RC0603FR-0710KL" RESC1608X55N 555,1180 r180 bottom value=10K (schematic designator R3)
R3_C "RC0603FR-0710KL" RESC1608X55N 1315,1180 r180 bottom value=10K (schematic designator R3)
R3_D "RC0603FR-0710KL" RESC1608X55N 2075,1180 r180 bottom value=10K (schematic designator R3)
R3_E "RC0603FR-0710KL" RESC1608X55N 1460,2000.47 r180 bottom value=10K (schematic designator R3)
R3_F "RC0603FR-0710KL" RESC1608X55N 530,2815 r180 bottom value=10K (schematic designator R3)
R3_G "RC0603FR-0710KL" RESC1608X55N 1075,3070 r270 bottom value=10K (schematic designator R3)
R3_H "RC0603FR-0710KL" RESC1608X55N 2100,2815 r180 bottom value=10K (schematic designator R3)
R4_A "RT0603BRD071KL" RESC1608X55N 544.09,2037.72 r90 top value=1K (schematic designator R4)
R4_B "RT0603BRD071KL" RESC1608X55N 279.09,1217.72 r90 top value=1K (schematic designator R4)
R4_C "RT0603BRD071KL" RESC1608X55N 1039.09,1217.72 r90 top value=1K (schematic designator R4)
R4_D "RT0603BRD071KL" RESC1608X55N 1799.09,1217.72 r90 top value=1K (schematic designator R4)
R4_E "RT0603BRD071KL" RESC1608X55N 1184.09,2038.19 r90 top value=1K (schematic designator R4)
R4_F "RT0603BRD071KL" RESC1608X55N 254.09,2852.72 r90 top value=1K (schematic designator R4)
R4_G "RT0603BRD071KL" RESC1608X55N 1037.28,2794.09 r180 top value=1K (schematic designator R4)
R4_H "RT0603BRD071KL" RESC1608X55N 1824.09,2852.72 r90 top value=1K (schematic designator R4)
R5_A "RT0603BRD07110RL" RESC1608X55N 649.09,1817.72 r180 top value=110R (schematic designator R5)
R5_B "RT0603BRD07110RL" RESC1608X55N 384.09,997.72 r180 top value=110R (schematic designator R5)
R5_C "RT0603BRD07110RL" RESC1608X55N 1144.09,997.72 r180 top value=110R (schematic designator R5)
R5_D "RT0603BRD07110RL" RESC1608X55N 1904.09,997.72 r180 top value=110R (schematic designator R5)
R5_E "RT0603BRD07110RL" RESC1608X55N 1289.09,1818.19 r180 top value=110R (schematic designator R5)
R5_F "RT0603BRD07110RL" RESC1608X55N 359.09,2632.72 r180 top value=110R (schematic designator R5)
R5_G "RT0603BRD07110RL" RESC1608X55N 1257.28,2899.09 r270 top value=110R (schematic designator R5)
R5_H "RT0603BRD07110RL" RESC1608X55N 1929.09,2632.72 r180 top value=110R (schematic designator R5)
R6_A "RT0603BRD071KL" RESC1608X55N 474.09,2037.72 r270 top value=1K (schematic designator R6)
R6_B "RT0603BRD071KL" RESC1608X55N 209.09,1217.72 r270 top value=1K (schematic designator R6)
R6_C "RT0603BRD071KL" RESC1608X55N 969.09,1217.72 r270 top value=1K (schematic designator R6)
R6_D "RT0603BRD071KL" RESC1608X55N 1729.09,1217.72 r270 top value=1K (schematic designator R6)
R6_E "RT0603BRD071KL" RESC1608X55N 1114.09,2038.19 r270 top value=1K (schematic designator R6)
R6_F "RT0603BRD071KL" RESC1608X55N 184.09,2852.72 r270 top value=1K (schematic designator R6)
R6_G "RT0603BRD071KL" RESC1608X55N 1037.28,2724.09 r0 top value=1K (schematic designator R6)
R6_H "RT0603BRD071KL" RESC1608X55N 1754.09,2852.72 r270 top value=1K (schematic designator R6)
R7_A "RT0603BRD071KL" RESC1608X55N 385,1790 r90 bottom value=1K (schematic designator R7)
R7_B "RT0603BRD071KL" RESC1608X55N 120,970 r90 bottom value=1K (schematic designator R7)
R7_C "RT0603BRD071KL" RESC1608X55N 880,970 r90 bottom value=1K (schematic designator R7)
R7_D "RT0603BRD071KL" RESC1608X55N 1640,970 r90 bottom value=1K (schematic designator R7)
R7_E "RT0603BRD071KL" RESC1608X55N 1025,1790.47 r90 bottom value=1K (schematic designator R7)
R7_F "RT0603BRD071KL" RESC1608X55N 95,2605 r90 bottom value=1K (schematic designator R7)
R7_G "RT0603BRD071KL" RESC1608X55N 1285,2635 r180 bottom value=1K (schematic designator R7)
R7_H "RT0603BRD071KL" RESC1608X55N 1665,2605 r90 bottom value=1K (schematic designator R7)
R8_A "RT0603BRD071KL" RESC1608X55N 390,2085 r90 bottom value=1K (schematic designator R8)
R8_B "RT0603BRD071KL" RESC1608X55N 125,1265 r90 bottom value=1K (schematic designator R8)
R8_C "RT0603BRD071KL" RESC1608X55N 885,1265 r90 bottom value=1K (schematic designator R8)
R8_D "RT0603BRD071KL" RESC1608X55N 1645,1265 r90 bottom value=1K (schematic designator R8)
R8_E "RT0603BRD071KL" RESC1608X55N 1030,2082.72 r90 bottom value=1K (schematic designator R8)
R8_F "RT0603BRD071KL" RESC1608X55N 100,2900 r90 bottom value=1K (schematic designator R8)
R8_G "RT0603BRD071KL" RESC1608X55N 990,2640 r180 bottom value=1K (schematic designator R8)
R8_H "RT0603BRD071KL" RESC1608X55N 1670,2900 r90 bottom value=1K (schematic designator R8)
R9_A "RMCF0603ZT0R00" RESC1608X55N 544.09,2167.72 r270 top value=0R (schematic designator R9)
R9_B "RMCF0603ZT0R00" RESC1608X55N 279.09,1347.72 r270 top value=0R (schematic designator R9)
R9_C "RMCF0603ZT0R00" RESC1608X55N 1039.09,1347.72 r270 top value=0R (schematic designator R9)
R9_D "RMCF0603ZT0R00" RESC1608X55N 1799.09,1347.72 r270 top value=0R (schematic designator R9)
R9_E "RMCF0603ZT0R00" RESC1608X55N 1184.09,2168.19 r270 top value=0R (schematic designator R9)
R9_F "RMCF0603ZT0R00" RESC1608X55N 254.09,2982.72 r270 top value=0R (schematic designator R9)
R9_G "RMCF0603ZT0R00" RESC1608X55N 907.28,2794.09 r0 top value=0R (schematic designator R9)
R9_H "RMCF0603ZT0R00" RESC1608X55N 1824.09,2982.72 r270 top value=0R (schematic designator R9)
R10_A "DNP" RESC1608X55N 474.09,2167.72 r270 top value=0R (schematic designator R10)
R10_B "DNP" RESC1608X55N 209.09,1347.72 r270 top value=0R (schematic designator R10)
R10_C "DNP" RESC1608X55N 969.09,1347.72 r270 top value=0R (schematic designator R10)
R10_D "DNP" RESC1608X55N 1729.09,1347.72 r270 top value=0R (schematic designator R10)
R10_E "DNP" RESC1608X55N 1114.09,2168.19 r270 top value=0R (schematic designator R10)
R10_F "DNP" RESC1608X55N 184.09,2982.72 r270 top value=0R (schematic designator R10)
R10_G "DNP" RESC1608X55N 907.28,2724.09 r0 top value=0R (schematic designator R10)
R10_H "DNP" RESC1608X55N 1754.09,2982.72 r270 top value=0R (schematic designator R10)
R11_A "RT0603BRD07510RL" RESC1608X55N 754.09,1907.72 r90 top value=510R (schematic designator R11)
R11_B "RT0603BRD07510RL" RESC1608X55N 489.09,1087.72 r90 top value=510R (schematic designator R11)
R11_C "RT0603BRD07510RL" RESC1608X55N 1249.09,1087.72 r90 top value=510R (schematic designator R11)
R11_D "RT0603BRD07510RL" RESC1608X55N 2009.09,1087.72 r90 top value=510R (schematic designator R11)
R11_E "RT0603BRD07510RL" RESC1608X55N 1394.09,1908.19 r90 top value=510R (schematic designator R11)
R11_F "RT0603BRD07510RL" RESC1608X55N 464.09,2722.72 r90 top value=510R (schematic designator R11)
R11_G "RT0603BRD07510RL" RESC1608X55N 1167.28,3004.09 r180 top value=510R (schematic designator R11)
R11_H "RT0603BRD07510RL" RESC1608X55N 2034.09,2722.72 r90 top value=510R (schematic designator R11)
R12_A "RT0603BRD071KL" RESC1608X55N 455,1790 r90 bottom value=1K (schematic designator R12)
R12_B "RT0603BRD071KL" RESC1608X55N 190,970 r90 bottom value=1K (schematic designator R12)
R12_C "RT0603BRD071KL" RESC1608X55N 950,970 r90 bottom value=1K (schematic designator R12)
R12_D "RT0603BRD071KL" RESC1608X55N 1710,970 r90 bottom value=1K (schematic designator R12)
R12_E "RT0603BRD071KL" RESC1608X55N 1095,1790.47 r90 bottom value=1K (schematic designator R12)
R12_F "RT0603BRD071KL" RESC1608X55N 165,2605 r90 bottom value=1K (schematic designator R12)
R12_G "RT0603BRD071KL" RESC1608X55N 1285,2705 r180 bottom value=1K (schematic designator R12)
R12_H "RT0603BRD071KL" RESC1608X55N 1735,2605 r90 bottom value=1K (schematic designator R12)
R13_A "RT0603BRD071KL" RESC1608X55N 460,2085 r90 bottom value=1K (schematic designator R13)
R13_B "RT0603BRD071KL" RESC1608X55N 195,1265 r90 bottom value=1K (schematic designator R13)
R13_C "RT0603BRD071KL" RESC1608X55N 955,1265 r90 bottom value=1K (schematic designator R13)
R13_D "RT0603BRD071KL" RESC1608X55N 1715,1265 r90 bottom value=1K (schematic designator R13)
R13_E "RT0603BRD071KL" RESC1608X55N 1100,2085.47 r90 bottom value=1K (schematic designator R13)
R13_F "RT0603BRD071KL" RESC1608X55N 170,2900 r90 bottom value=1K (schematic designator R13)
R13_G "RT0603BRD071KL" RESC1608X55N 990,2710 r180 bottom value=1K (schematic designator R13)
R13_H "RT0603BRD071KL" RESC1608X55N 1740,2900 r90 bottom value=1K (schematic designator R13)
R14_A "RT0603BRD071KL" RESC1608X55N 754.09,2037.72 r90 top value=1K (schematic designator R14)
R14_B "RT0603BRD071KL" RESC1608X55N 489.09,1217.72 r90 top value=1K (schematic designator R14)
R14_C "RT0603BRD071KL" RESC1608X55N 1249.09,1217.72 r90 top value=1K (schematic designator R14)
R14_D "RT0603BRD071KL" RESC1608X55N 2009.09,1217.72 r90 top value=1K (schematic designator R14)
R14_E "RT0603BRD071KL" RESC1608X55N 1394.09,2038.19 r90 top value=1K (schematic designator R14)
R14_F "RT0603BRD071KL" RESC1608X55N 464.09,2852.72 r90 top value=1K (schematic designator R14)
R14_G "RT0603BRD071KL" RESC1608X55N 1037.28,3004.09 r180 top value=1K (schematic designator R14)
R14_H "RT0603BRD071KL" RESC1608X55N 2034.09,2852.72 r90 top value=1K (schematic designator R14)
R15_A "RMCF0603ZT0R00" RESC1608X55N 845,2155 r180 bottom value=0R (schematic designator R15)
R15_B "RMCF0603ZT0R00" RESC1608X55N 580,1335 r180 bottom value=0R (schematic designator R15)
R15_C "RMCF0603ZT0R00" RESC1608X55N 1340,1335 r180 bottom value=0R (schematic designator R15)
R15_D "RMCF0603ZT0R00" RESC1608X55N 2100,1335 r180 bottom value=0R (schematic designator R15)
R15_E "RMCF0603ZT0R00" RESC1608X55N 1485,2155.47 r180 bottom value=0R (schematic designator R15)
R15_F "RMCF0603ZT0R00" RESC1608X55N 555,2970 r180 bottom value=0R (schematic designator R15)
R15_G "RMCF0603ZT0R00" RESC1608X55N 920,3095 r270 bottom value=0R (schematic designator R15)
R15_H "RMCF0603ZT0R00" RESC1608X55N 2125,2970 r180 bottom value=0R (schematic designator R15)
R16_A "RT0603BRE0750RL" RESC1608X55N 845,2225 r180 bottom value=50R (schematic designator R16)
R16_B "RT0603BRE0750RL" RESC1608X55N 580,1405 r180 bottom value=50R (schematic designator R16)
R16_C "RT0603BRE0750RL" RESC1608X55N 1340,1405 r180 bottom value=50R (schematic designator R16)
R16_D "RT0603BRE0750RL" RESC1608X55N 2100,1405 r180 bottom value=50R (schematic designator R16)
R16_E "RT0603BRE0750RL" RESC1608X55N 1485,2225.47 r180 bottom value=50R (schematic designator R16)
R16_F "RT0603BRE0750RL" RESC1608X55N 555,3040 r180 bottom value=50R (schematic designator R16)
R16_G "RT0603BRE0750RL" RESC1608X55N 850,3095 r270 bottom value=50R (schematic designator R16)
R16_H "RT0603BRE0750RL" RESC1608X55N 2125,3040 r180 bottom value=50R (schematic designator R16)
R17_A "RT0603BRE0722KL" RESC1608X55N 532.28,2207.72 r90 bottom value=22K (schematic designator R17)
R17_B "RT0603BRE0722KL" RESC1608X55N 267.28,1387.72 r90 bottom value=22K (schematic designator R17)
R17_C "RT0603BRE0722KL" RESC1608X55N 1027.28,1387.72 r90 bottom value=22K (schematic designator R17)
R17_D "RT0603BRE0722KL" RESC1608X55N 1787.28,1387.72 r90 bottom value=22K (schematic designator R17)
R17_E "RT0603BRE0722KL" RESC1608X55N 1172.28,2208.19 r90 bottom value=22K (schematic designator R17)
R17_F "RT0603BRE0722KL" RESC1608X55N 242.28,3022.72 r90 bottom value=22K (schematic designator R17)
R17_G "RT0603BRE0722KL" RESC1608X55N 867.28,2782.28 r180 bottom value=22K (schematic designator R17)
R17_H "RT0603BRE0722KL" RESC1608X55N 1812.28,3022.72 r90 bottom value=22K (schematic designator R17)
R18_A "RT0603BRD071KL" RESC1608X55N 602.28,2207.72 r270 bottom value=1K (schematic designator R18)
R18_B "RT0603BRD071KL" RESC1608X55N 337.28,1387.72 r270 bottom value=1K (schematic designator R18)
R18_C "RT0603BRD071KL" RESC1608X55N 1097.28,1387.72 r270 bottom value=1K (schematic designator R18)
R18_D "RT0603BRD071KL" RESC1608X55N 1857.28,1387.72 r270 bottom value=1K (schematic designator R18)
R18_E "RT0603BRD071KL" RESC1608X55N 1242.28,2208.19 r270 bottom value=1K (schematic designator R18)
R18_F "RT0603BRD071KL" RESC1608X55N 312.28,3022.72 r270 bottom value=1K (schematic designator R18)
R18_G "RT0603BRD071KL" RESC1608X55N 867.28,2852.28 r0 bottom value=1K (schematic designator R18)
R18_H "RT0603BRD071KL" RESC1608X55N 1882.28,3022.72 r270 bottom value=1K (schematic designator R18)
R19_A "RT0603BRD073K3L" RESC1608X55N 526.81,1682.72 r270 bottom value=3K3 (schematic designator R19)
R19_B "RT0603BRD073K3L" RESC1608X55N 261.81,862.72 r270 bottom value=3K3 (schematic designator R19)
R19_C "RT0603BRD073K3L" RESC1608X55N 1021.81,862.72 r270 bottom value=3K3 (schematic designator R19)
R19_D "RT0603BRD073K3L" RESC1608X55N 1781.81,862.72 r270 bottom value=3K3 (schematic designator R19)
R19_E "RT0603BRD073K3L" RESC1608X55N 1166.81,1683.19 r270 bottom value=3K3 (schematic designator R19)
R19_F "RT0603BRD073K3L" RESC1608X55N 236.81,2497.72 r270 bottom value=3K3 (schematic designator R19)
R19_G "RT0603BRD073K3L" RESC1608X55N 1392.28,2776.81 r0 bottom value=3K3 (schematic designator R19)
R19_H "RT0603BRD073K3L" RESC1608X55N 1806.81,2497.72 r270 bottom value=3K3 (schematic designator R19)
R20_A "RT0603BRD07200RL" RESC1608X55N 596.81,1682.72 r90 bottom value=200R (schematic designator R20)
R20_B "RT0603BRD07200RL" RESC1608X55N 331.81,862.72 r90 bottom value=200R (schematic designator R20)
R20_C "RT0603BRD07200RL" RESC1608X55N 1091.81,862.72 r90 bottom value=200R (schematic designator R20)
R20_D "RT0603BRD07200RL" RESC1608X55N 1851.81,862.72 r90 bottom value=200R (schematic designator R20)
R20_E "RT0603BRD07200RL" RESC1608X55N 1236.81,1683.19 r90 bottom value=200R (schematic designator R20)
R20_F "RT0603BRD07200RL" RESC1608X55N 306.81,2497.72 r90 bottom value=200R (schematic designator R20)
R20_G "RT0603BRD07200RL" RESC1608X55N 1392.28,2846.81 r180 bottom value=200R (schematic designator R20)
R20_H "RT0603BRD07200RL" RESC1608X55N 1876.81,2497.72 r90 bottom value=200R (schematic designator R20)
R21_A "RT0603BRD0743KL" RESC1608X55N 672.28,2207.72 r90 bottom value=43K (schematic designator R21)
R21_B "RT0603BRD0743KL" RESC1608X55N 407.28,1387.72 r90 bottom value=43K (schematic designator R21)
R21_C "RT0603BRD0743KL" RESC1608X55N 1167.28,1387.72 r90 bottom value=43K (schematic designator R21)
R21_D "RT0603BRD0743KL" RESC1608X55N 1927.28,1387.72 r90 bottom value=43K (schematic designator R21)
R21_E "RT0603BRD0743KL" RESC1608X55N 1312.28,2208.19 r90 bottom value=43K (schematic designator R21)
R21_F "RT0603BRD0743KL" RESC1608X55N 382.28,3022.72 r90 bottom value=43K (schematic designator R21)
R21_G "RT0603BRD0743KL" RESC1608X55N 867.28,2922.28 r180 bottom value=43K (schematic designator R21)
R21_H "RT0603BRD0743KL" RESC1608X55N 1952.28,3022.72 r90 bottom value=43K (schematic designator R21)
R22_A "RT0603BRD072K7L" RESC1608X55N 742.28,2207.72 r270 bottom value=2K7 (schematic designator R22)
R22_B "RT0603BRD072K7L" RESC1608X55N 477.28,1387.72 r270 bottom value=2K7 (schematic designator R22)
R22_C "RT0603BRD072K7L" RESC1608X55N 1237.28,1387.72 r270 bottom value=2K7 (schematic designator R22)
R22_D "RT0603BRD072K7L" RESC1608X55N 1997.28,1387.72 r270 bottom value=2K7 (schematic designator R22)
R22_E "RT0603BRD072K7L" RESC1608X55N 1382.28,2208.19 r270 bottom value=2K7 (schematic designator R22)
R22_F "RT0603BRD072K7L" RESC1608X55N 452.28,3022.72 r270 bottom value=2K7 (schematic designator R22)
R22_G "RT0603BRD072K7L" RESC1608X55N 867.28,2992.28 r0 bottom value=2K7 (schematic designator R22)
R22_H "RT0603BRD072K7L" RESC1608X55N 2022.28,3022.72 r270 bottom value=2K7 (schematic designator R22)
R23_A "RT0603BRD071K8L" RESC1608X55N 671.81,1682.72 r270 bottom value=1K8 (schematic designator R23)
R23_B "RT0603BRD071K8L" RESC1608X55N 406.81,862.72 r270 bottom value=1K8 (schematic designator R23)
R23_C "RT0603BRD071K8L" RESC1608X55N 1166.81,862.72 r270 bottom value=1K8 (schematic designator R23)
R23_D "RT0603BRD071K8L" RESC1608X55N 1926.81,862.72 r270 bottom value=1K8 (schematic designator R23)
R23_E "RT0603BRD071K8L" RESC1608X55N 1311.81,1683.19 r270 bottom value=1K8 (schematic designator R23)
R23_F "RT0603BRD071K8L" RESC1608X55N 381.81,2497.72 r270 bottom value=1K8 (schematic designator R23)
R23_G "RT0603BRD071K8L" RESC1608X55N 1392.28,2921.81 r0 bottom value=1K8 (schematic designator R23)
R23_H "RT0603BRD071K8L" RESC1608X55N 1951.81,2497.72 r270 bottom value=1K8 (schematic designator R23)
R24_A "RMCF0603ZT0R00" RESC1608X55N 741.81,1682.72 r90 bottom value=0R (schematic designator R24)
R24_B "RMCF0603ZT0R00" RESC1608X55N 476.81,862.72 r90 bottom value=0R (schematic designator R24)
R24_C "RMCF0603ZT0R00" RESC1608X55N 1236.81,862.72 r90 bottom value=0R (schematic designator R24)
R24_D "RMCF0603ZT0R00" RESC1608X55N 1996.81,862.72 r90 bottom value=0R (schematic designator R24)
R24_E "RMCF0603ZT0R00" RESC1608X55N 1381.81,1683.19 r90 bottom value=0R (schematic designator R24)
R24_F "RMCF0603ZT0R00" RESC1608X55N 451.81,2497.72 r90 bottom value=0R (schematic designator R24)
R24_G "RMCF0603ZT0R00" RESC1608X55N 1392.28,2991.81 r180 bottom value=0R (schematic designator R24)
R24_H "RMCF0603ZT0R00" RESC1608X55N 2021.81,2497.72 r90 bottom value=0R (schematic designator R24)
R25 "RMCF0603FT3K57" RESC1608X55N 2077.58,2277.48 r90 bottom value=3K57
R26 "RMCF0603FT10K5" RESC1608X55N 1820.17,2085.3 r90 top value=10K5
R27 "RMCF0603FT1K15" RESC1608X55N 2077.58,2146.73 r90 bottom value=1K15
R28 "ERJ-3EKF2001V" RESC1608X55N 1820.17,1957.96 r90 top value=2K
R29 "DNP" RESC1608X55N 720,465 r270 bottom value=0R
R30 "DNP" RESC1608X55N 855,75 r180 bottom value=0R
R31 "DNP" RESC1608X55N 655,360 r180 bottom value=0R
R32 "RMCF0603ZT0R00" RESC1608X55N 835,655 r180 bottom value=0R
R33 "DNP" RESC1608X55N 1030,105 r270 bottom value=0R
R34 "RMCF0603ZT0R00" RESC1608X55N 960,105 r270 bottom value=0R
R35 "RT0603BRD071KL" RESC1608X55N 2176.91,1527.21 r270 top value=1K
R36 "RT0603BRD071KL" RESC1608X55N 2001.91,1525.34 r270 top value=1K
R37 "RMCF0603ZT0R00" RESC1608X55N 605,200 r180 bottom value=0R
R38 "RMCF0603ZT0R00" RESC1608X55N 1650,200 r0 bottom value=0R
R39 "RMCF0603ZT0R00" RESC1608X55N 1650,515 r0 bottom value=0R
R40 "RMCF0603ZT0R00" RESC1608X55N 605,515 r180 bottom value=0R
R41 "RT0603BRD071KL" RESC1608X55N 2130.91,2275.59 r270 top value=1K
R42 "RC0603FR-0710KL" RESC1608X55N 705,2595 r270 top value=10K
R43 "RC0603FR-0710KL" RESC1608X55N 775,2595 r270 top value=10K
R44 "ERJ-3RQFR30V" RESC1608X55N 1705,1745 r180 bottom value=0R3
R45 "ERJ-3BWFR036V" RESC1608X55N 1790,1860 r0 top value=36m
R46 "RC0603FR-0710KL" RESC1608X55N 1830,1615 r0 top value=10K
R47 "RC0603FR-0710KL" RESC1608X55N 1631.69,1629.83 r90 bottom value=10K
R48 "RC0603FR-07100RL" RESC1608X55N 590,2475 r270 top value=100R
R49 "RC0603FR-07100RL" RESC1608X55N 557,2376 r180 top value=100R
R50 "RMCF0603ZT0R00" RESC1608X55N 1945,1915 r180 top value=0R
R51 "DNP" RESC1608X55N 1915,1815 r270 top value=0R
R52 "RMCF0603ZT0R00" RESC1608X55N 1705,2185 r180 top value=0R
R53 "DNP" RESC1608X55N 1705,2255 r180 top value=0R
R54 "RC0603FR-07100RL" RESC1608X55N 595,2665 r90 top value=100R
R55 "RC0603FR-07100RL" RESC1608X55N 665,2725 r270 top value=100R
TP1_A "testPoint" testPoint_pad 410,2022 r90 top (schematic designator TP1)
TP1_B "testPoint" testPoint_pad 145,1202 r90 top (schematic designator TP1)
TP1_C "testPoint" testPoint_pad 905,1202 r90 top (schematic designator TP1)
TP1_D "testPoint" testPoint_pad 1665,1202 r90 top (schematic designator TP1)
TP1_E "testPoint" testPoint_pad 1050,2022.47 r90 top (schematic designator TP1)
TP1_F "testPoint" testPoint_pad 120,2837 r90 top (schematic designator TP1)
TP1_G "testPoint" testPoint_pad 1053,2660 r180 top (schematic designator TP1)
TP1_H "testPoint" testPoint_pad 1690,2837 r90 top (schematic designator TP1)
TP2_A "testPoint" testPoint_pad 410,2070 r90 top (schematic designator TP2)
TP2_B "testPoint" testPoint_pad 145,1250 r90 top (schematic designator TP2)
TP2_C "testPoint" testPoint_pad 905,1250 r90 top (schematic designator TP2)
TP2_D "testPoint" testPoint_pad 1665,1250 r90 top (schematic designator TP2)
TP2_E "testPoint" testPoint_pad 1050,2070.47 r90 top (schematic designator TP2)
TP2_F "testPoint" testPoint_pad 120,2885 r90 top (schematic designator TP2)
TP2_G "testPoint" testPoint_pad 1005,2660 r180 top (schematic designator TP2)
TP2_H "testPoint" testPoint_pad 1690,2885 r90 top (schematic designator TP2)
TP3_A "testPoint" testPoint_pad 425,2260 r90 top (schematic designator TP3)
TP3_B "testPoint" testPoint_pad 210,1475 r90 top (schematic designator TP3)
TP3_C "testPoint" testPoint_pad 970,1475 r90 top (schematic designator TP3)
TP3_D "testPoint" testPoint_pad 1680,1440 r90 top (schematic designator TP3)
TP3_E "testPoint" testPoint_pad 1065,2260.47 r90 top (schematic designator TP3)
TP3_F "testPoint" testPoint_pad 135,3075 r90 top (schematic designator TP3)
TP3_G "testPoint" testPoint_pad 785,2690 r180 top (schematic designator TP3)
TP3_H "testPoint" testPoint_pad 1705,3075 r90 top (schematic designator TP3)
TP4_A "testPoint" testPoint_pad 370,2260 r90 top (schematic designator TP4)
TP4_B "testPoint" testPoint_pad 105,1440 r90 top (schematic designator TP4)
TP4_C "testPoint" testPoint_pad 865,1440 r90 top (schematic designator TP4)
TP4_D "testPoint" testPoint_pad 1625,1440 r90 top (schematic designator TP4)
TP4_E "testPoint" testPoint_pad 990,2220 r90 top (schematic designator TP4)
TP4_F "testPoint" testPoint_pad 80,3075 r90 top (schematic designator TP4)
TP4_G "testPoint" testPoint_pad 856.17,2660.43 r180 top (schematic designator TP4)
TP4_H "testPoint" testPoint_pad 1650,3075 r90 top (schematic designator TP4)
TP5 "testPoint_throughHole" testPoint_ThroughHole 1508,1605 r90 top